# Altium PCB MB1814.PcbDoc (part 1 of 6)
Units mm, origin at the board's own origin, x right, y up, seen from the top; angles counter-clockwise.
Board outline 70 x 82.5 mm, 4 copper layers (Top Layer, Signal Layer 1, Signal Layer 2, Bottom Layer), stack 1.614 mm thick; 212 components, 160 nets, 914 pads, 715 vias.
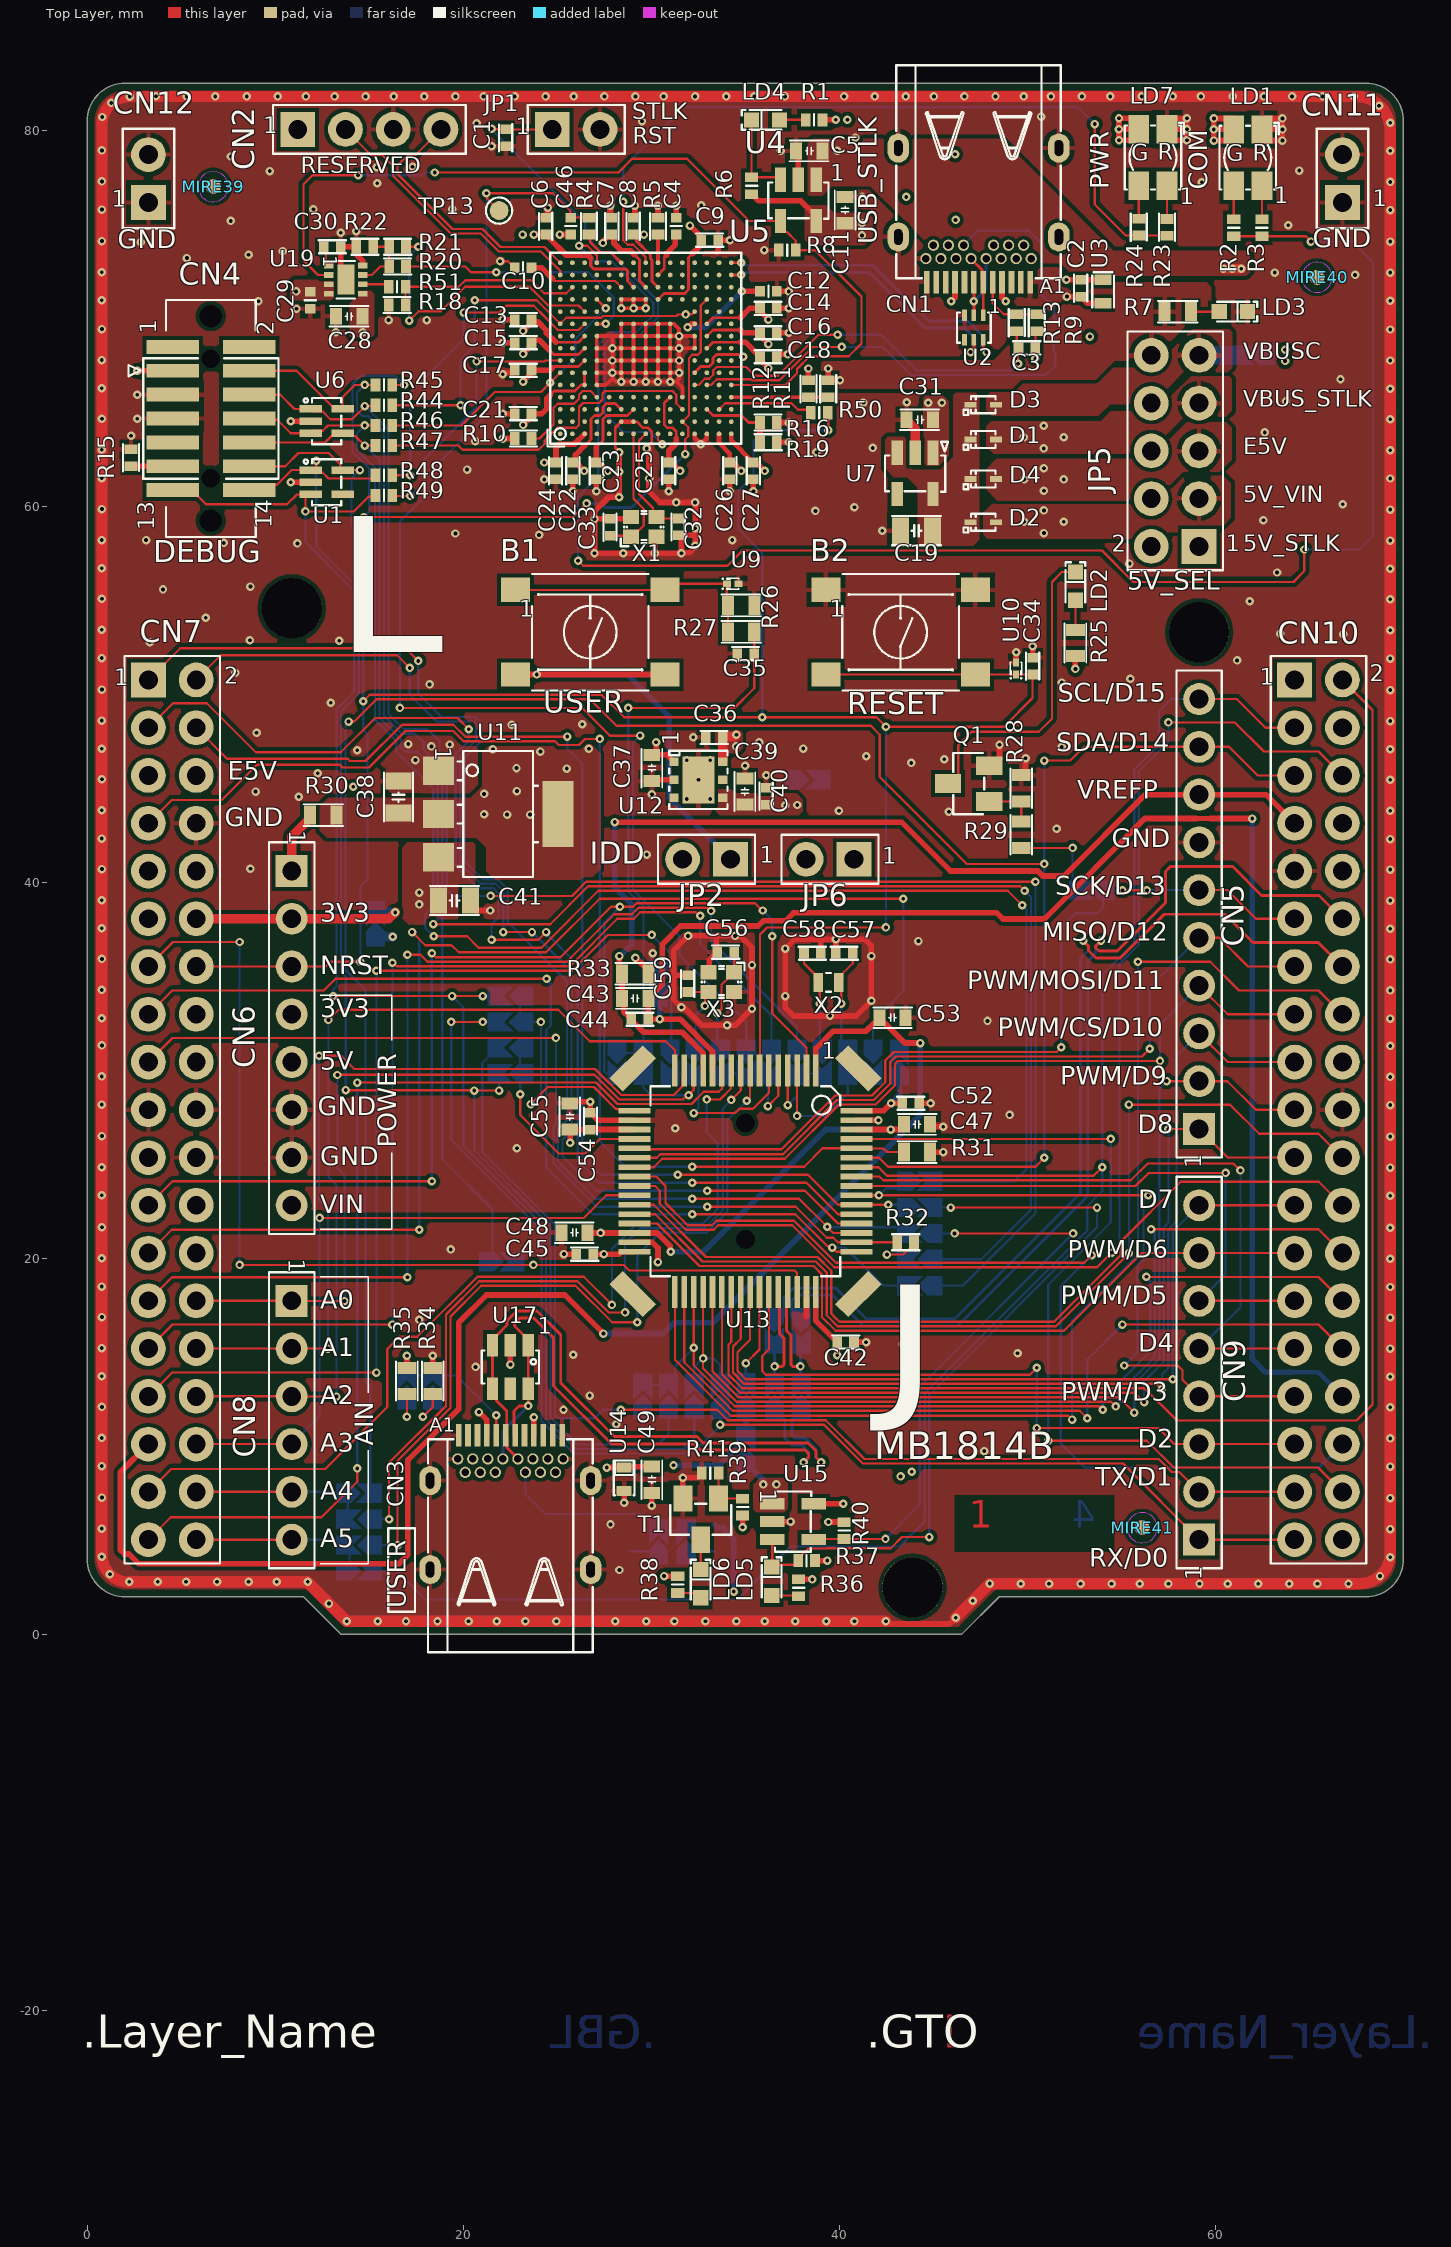
[diagram p0: Top Layer view]
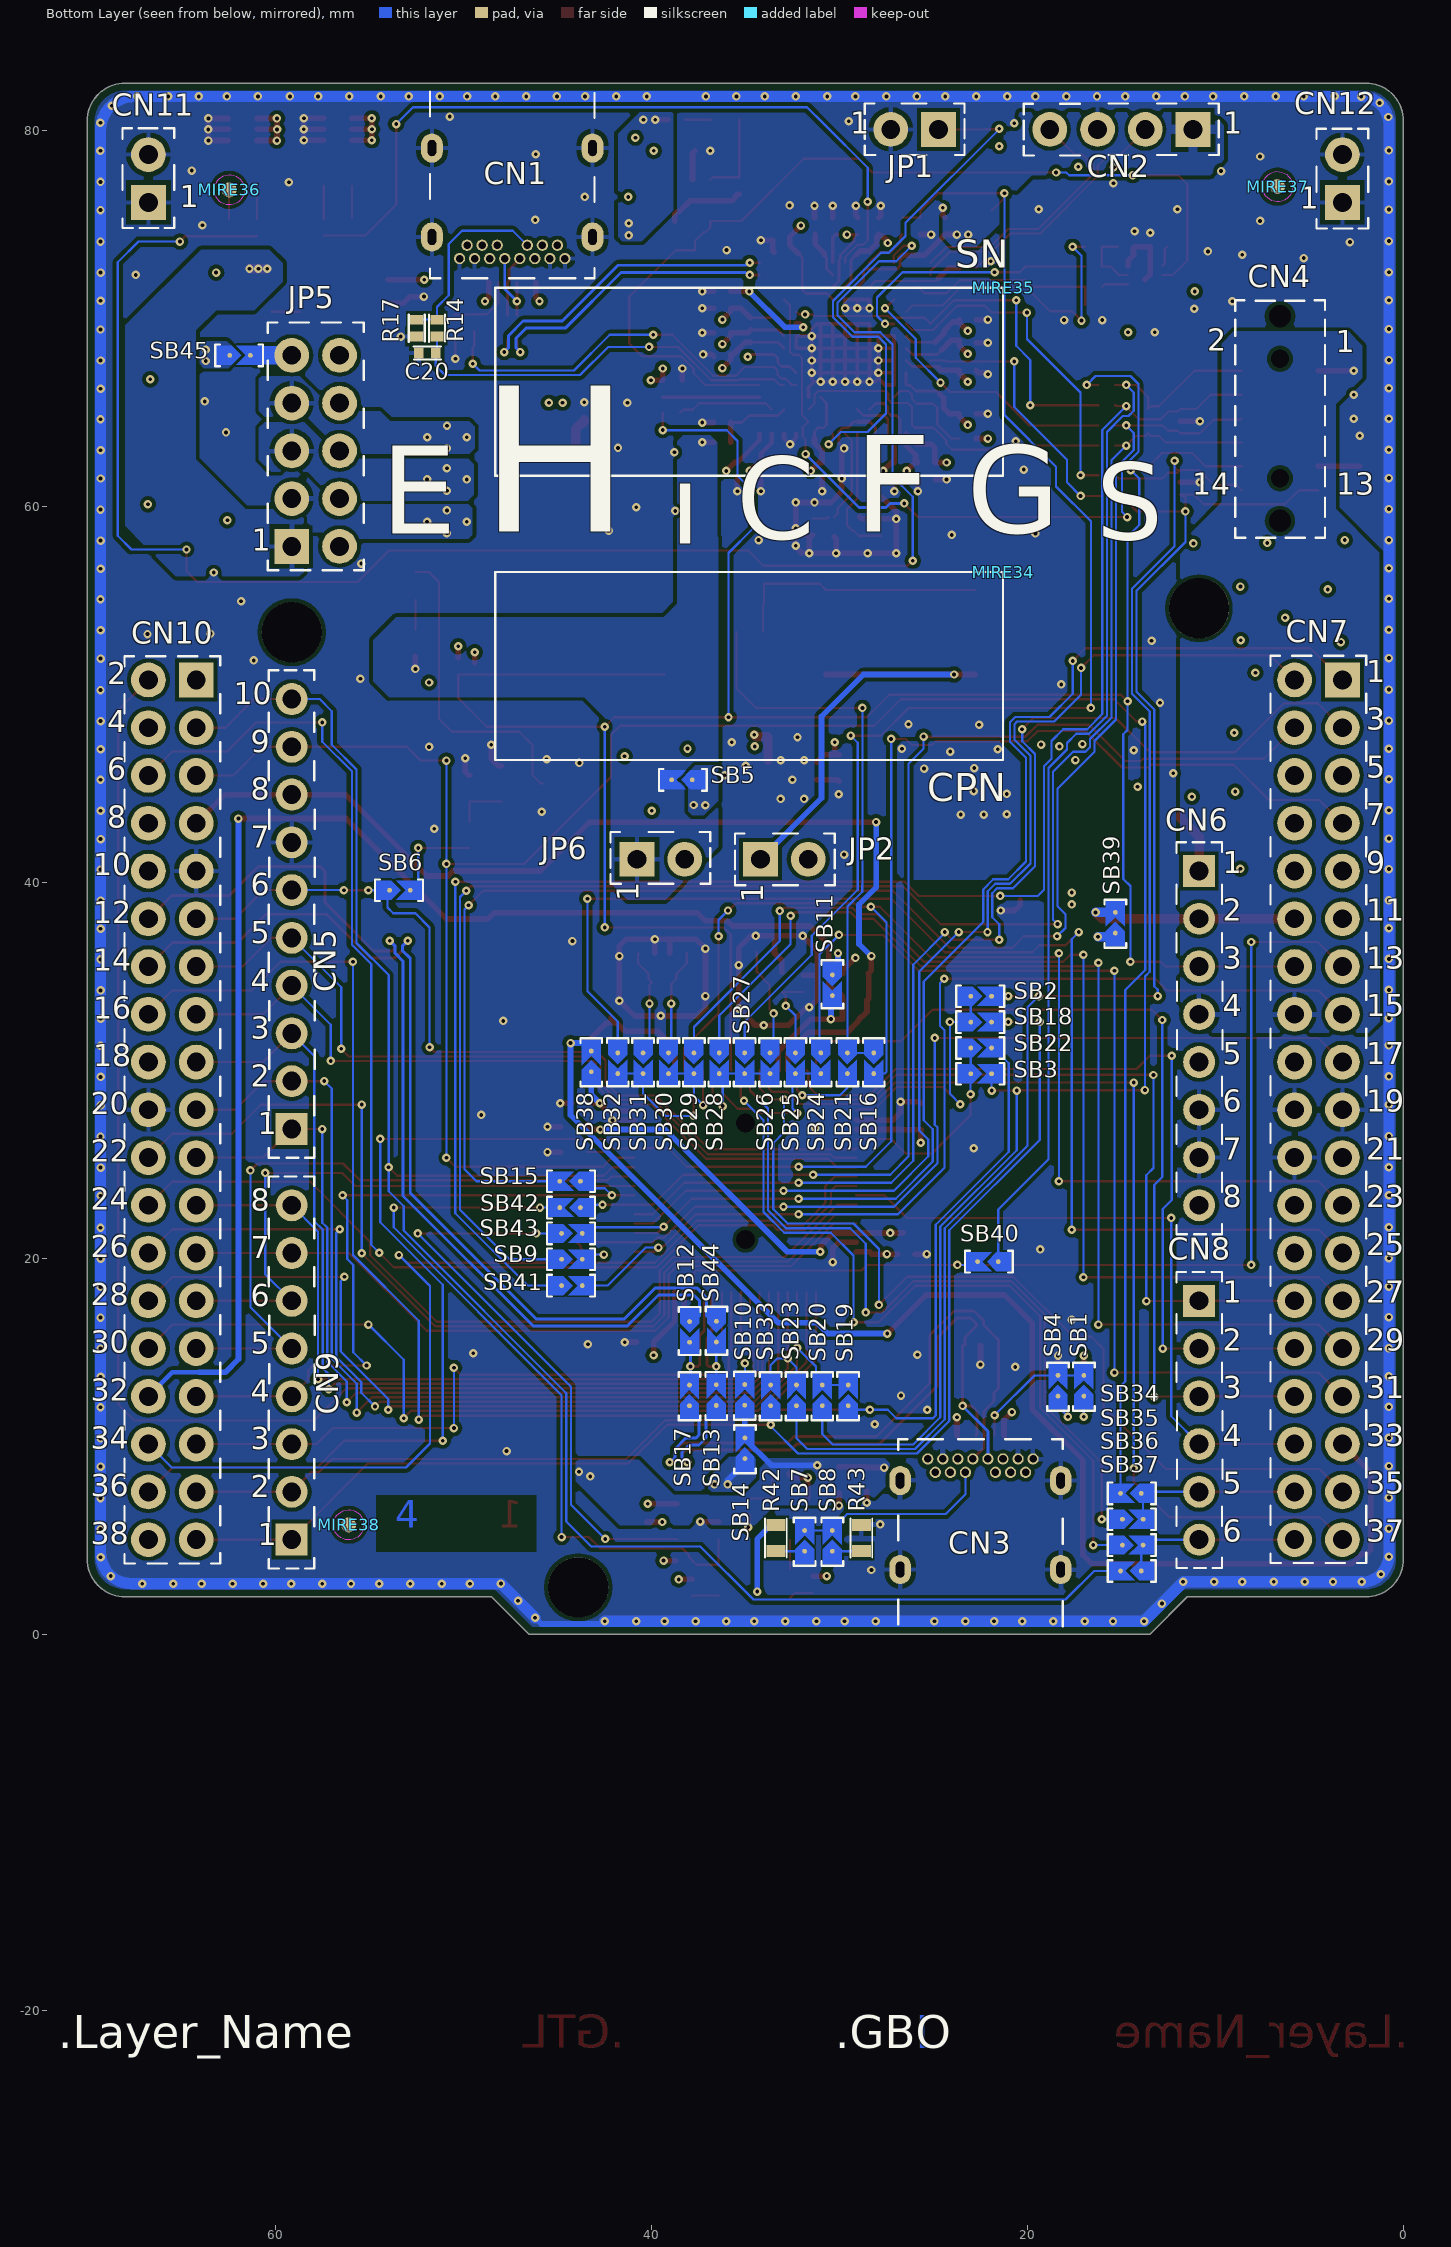
[diagram p1: Bottom Layer view, seen from below]
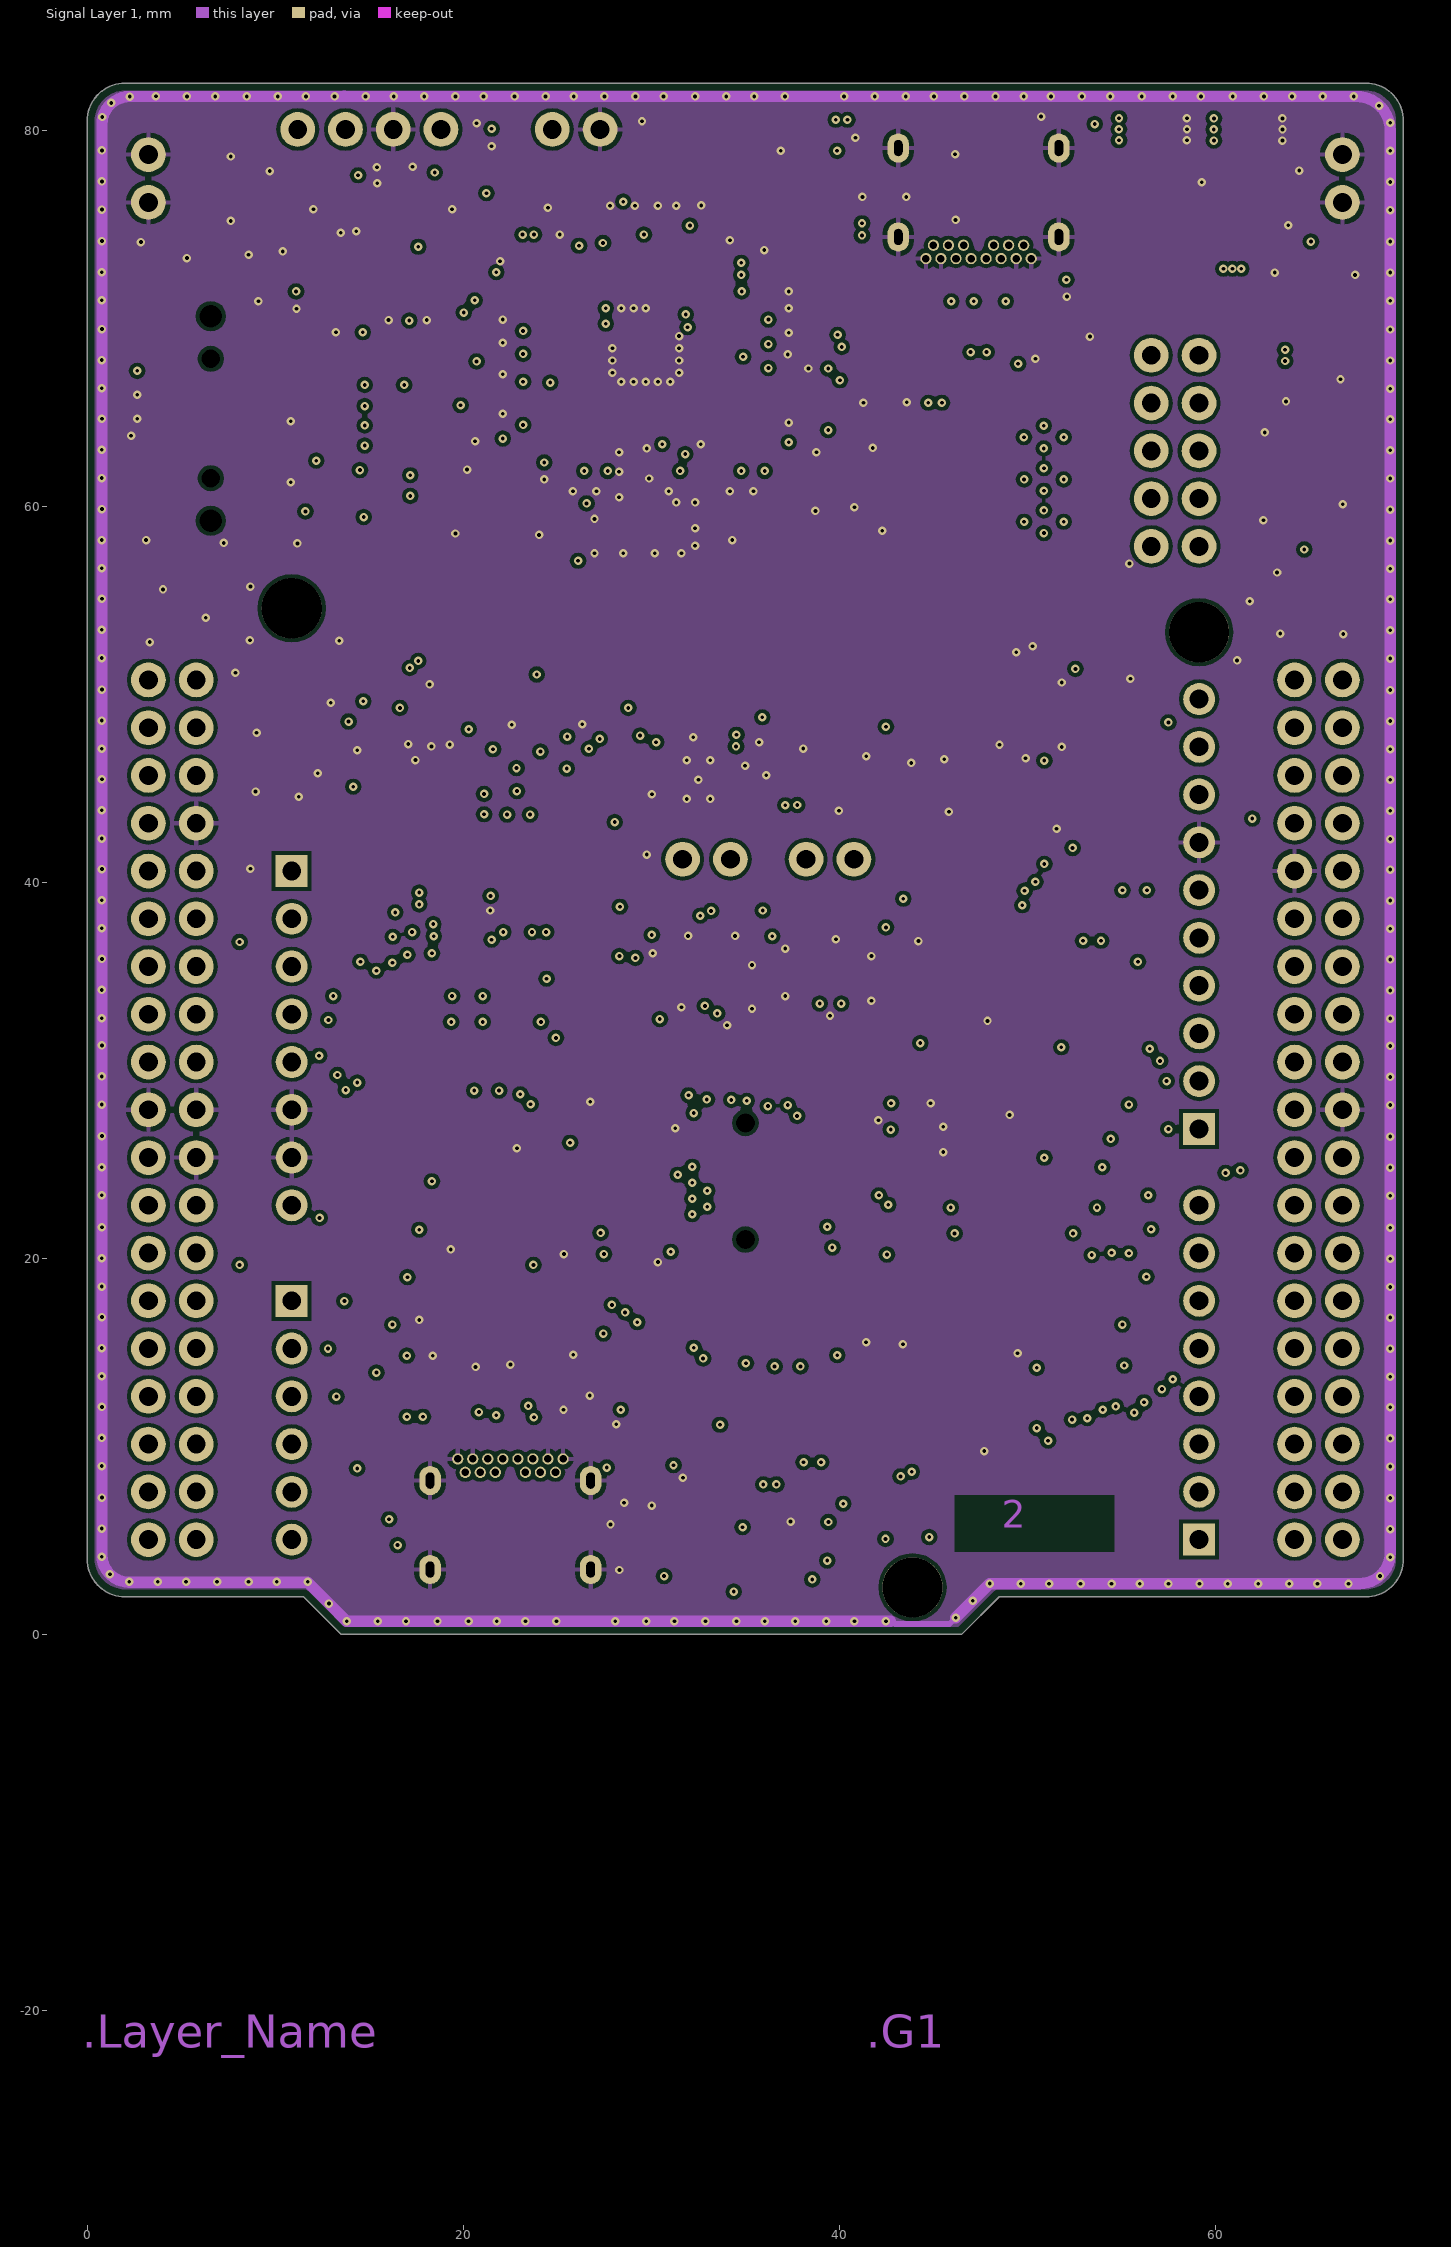
[diagram p2: Signal Layer 1]
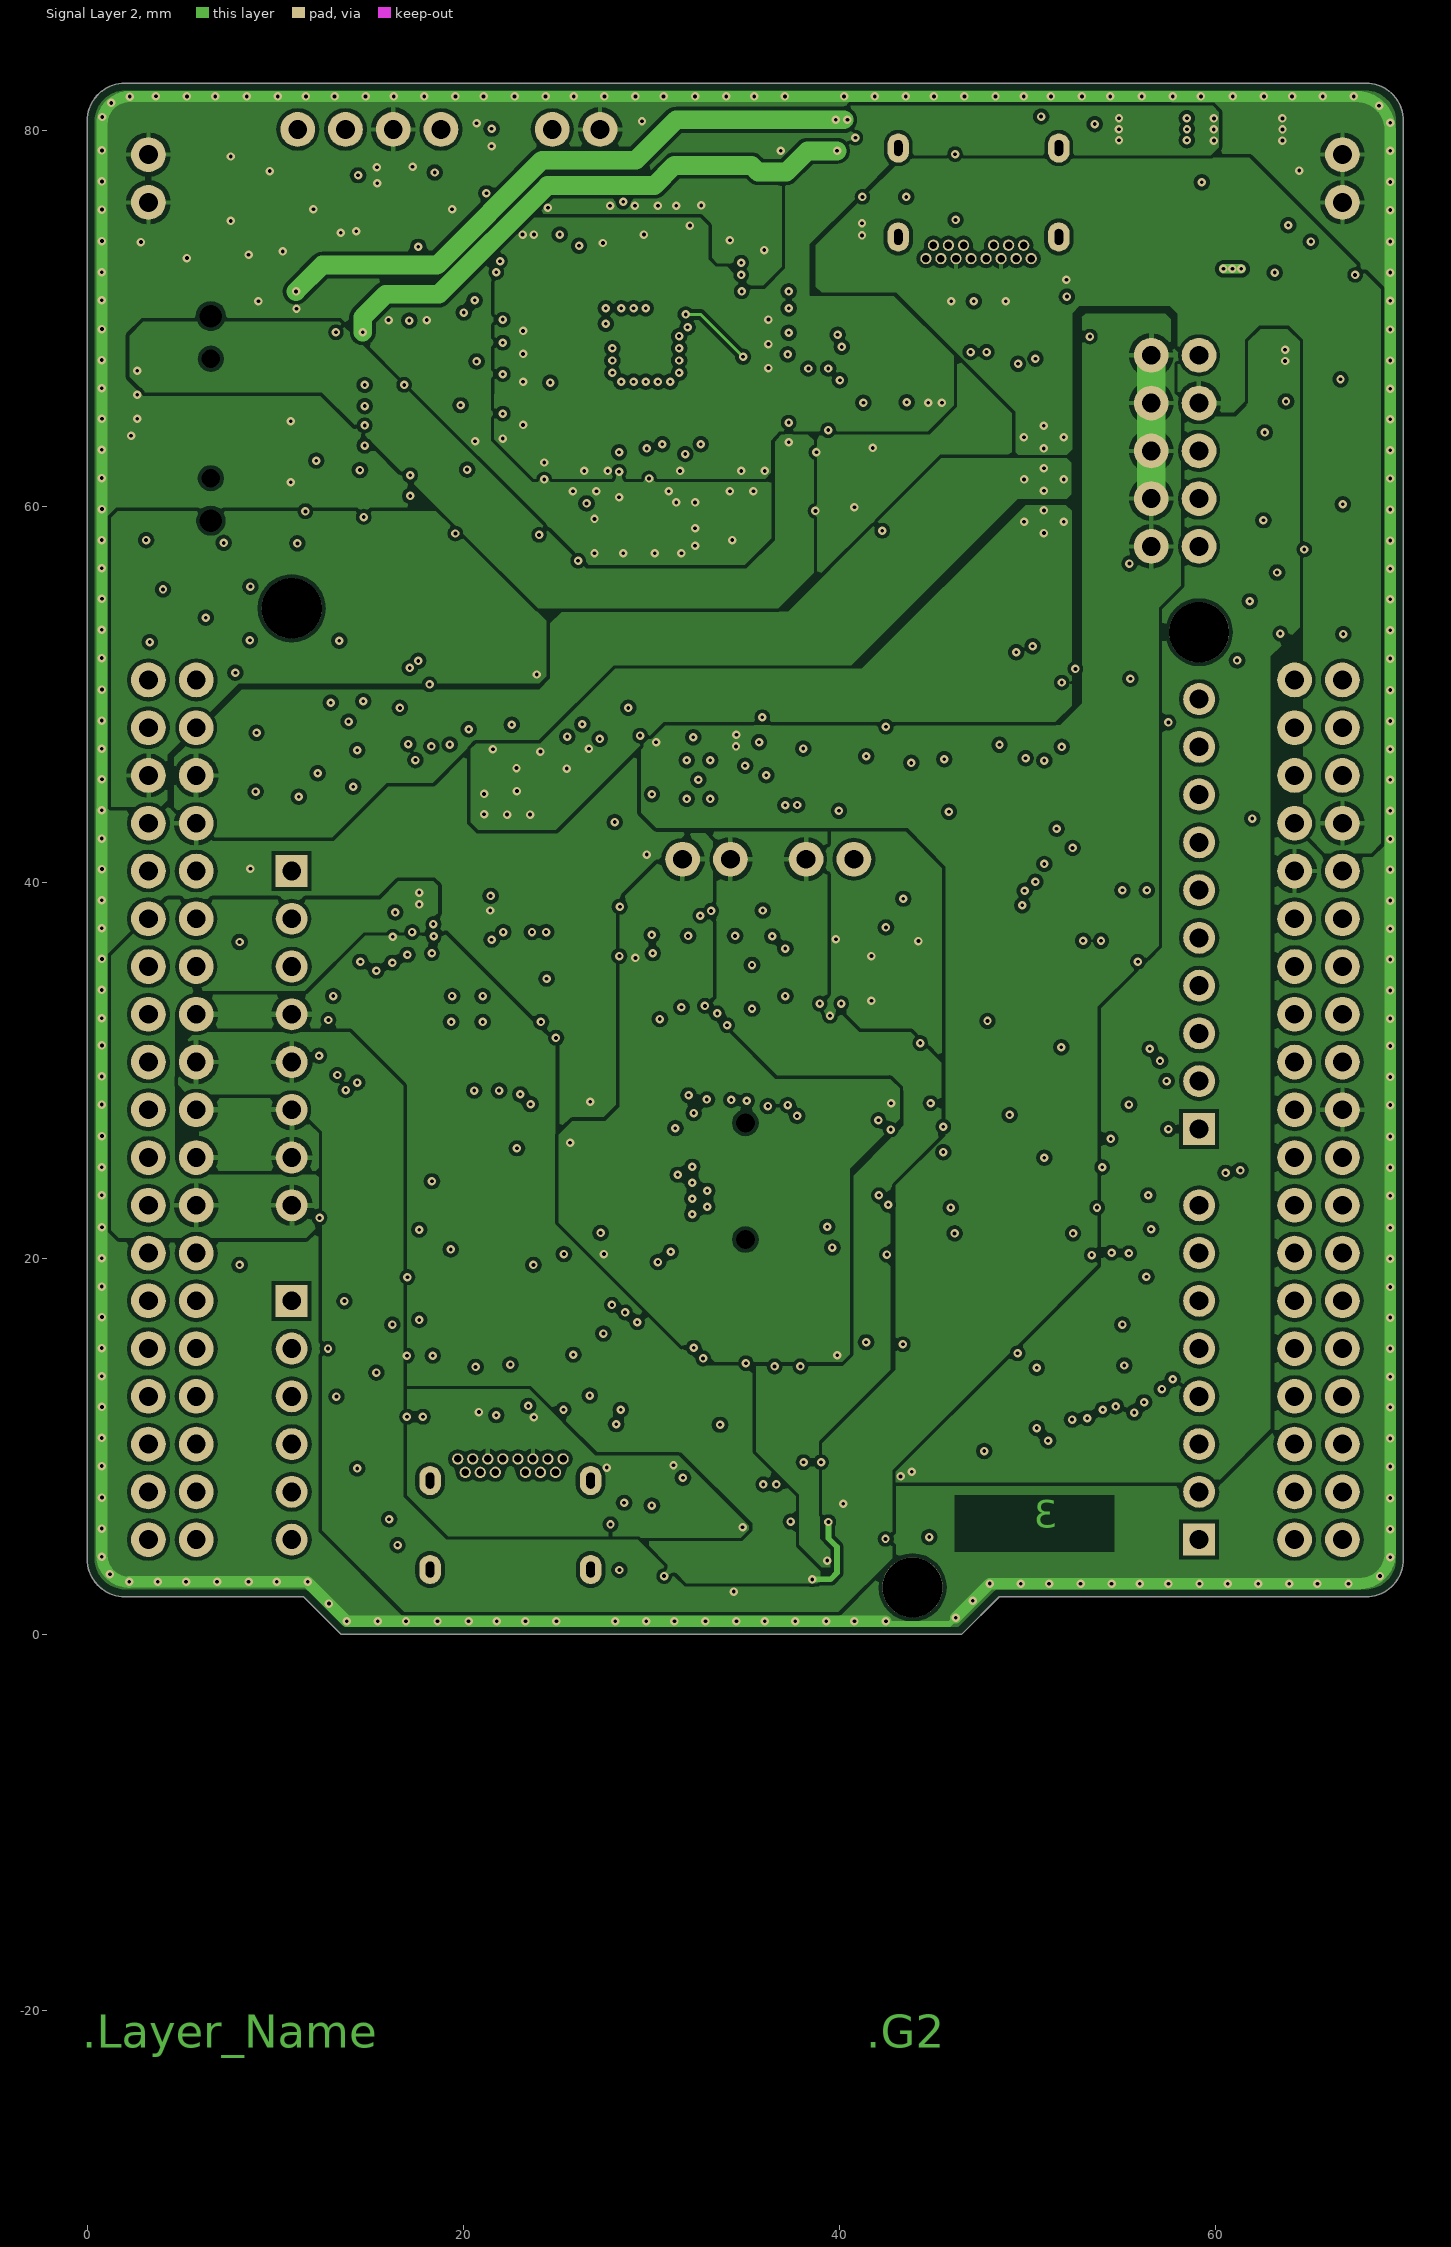
[diagram p3: Signal Layer 2]
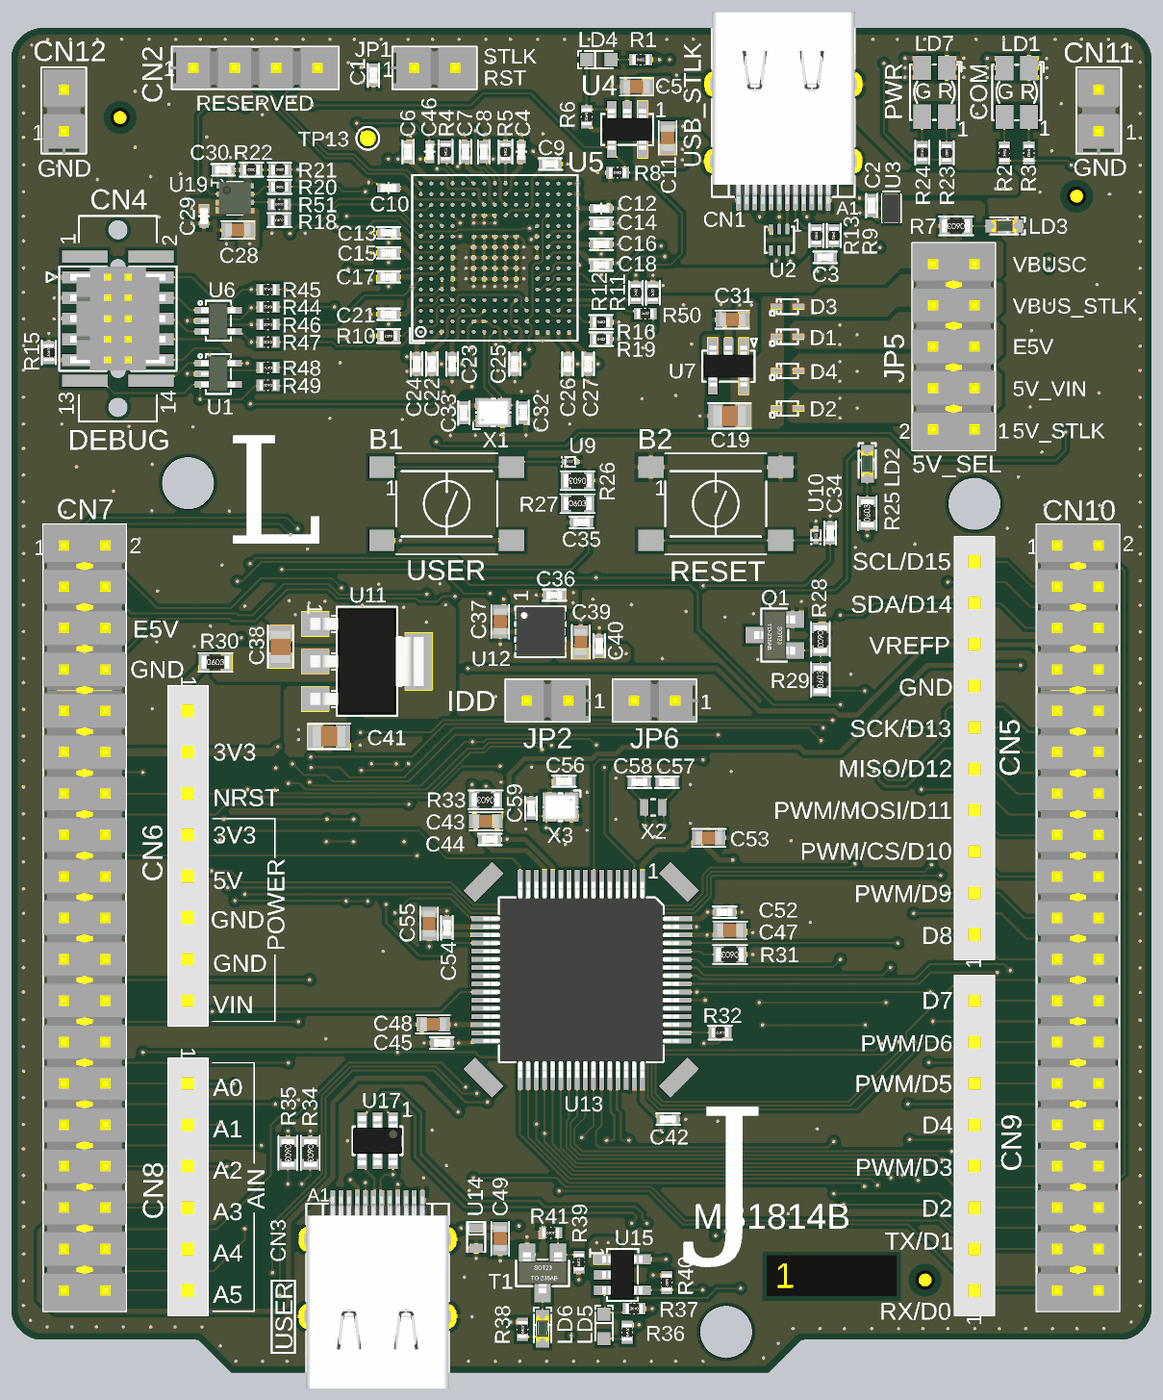
[diagram p7: 3D render of the assembled board from above, using the file's embedded part models]
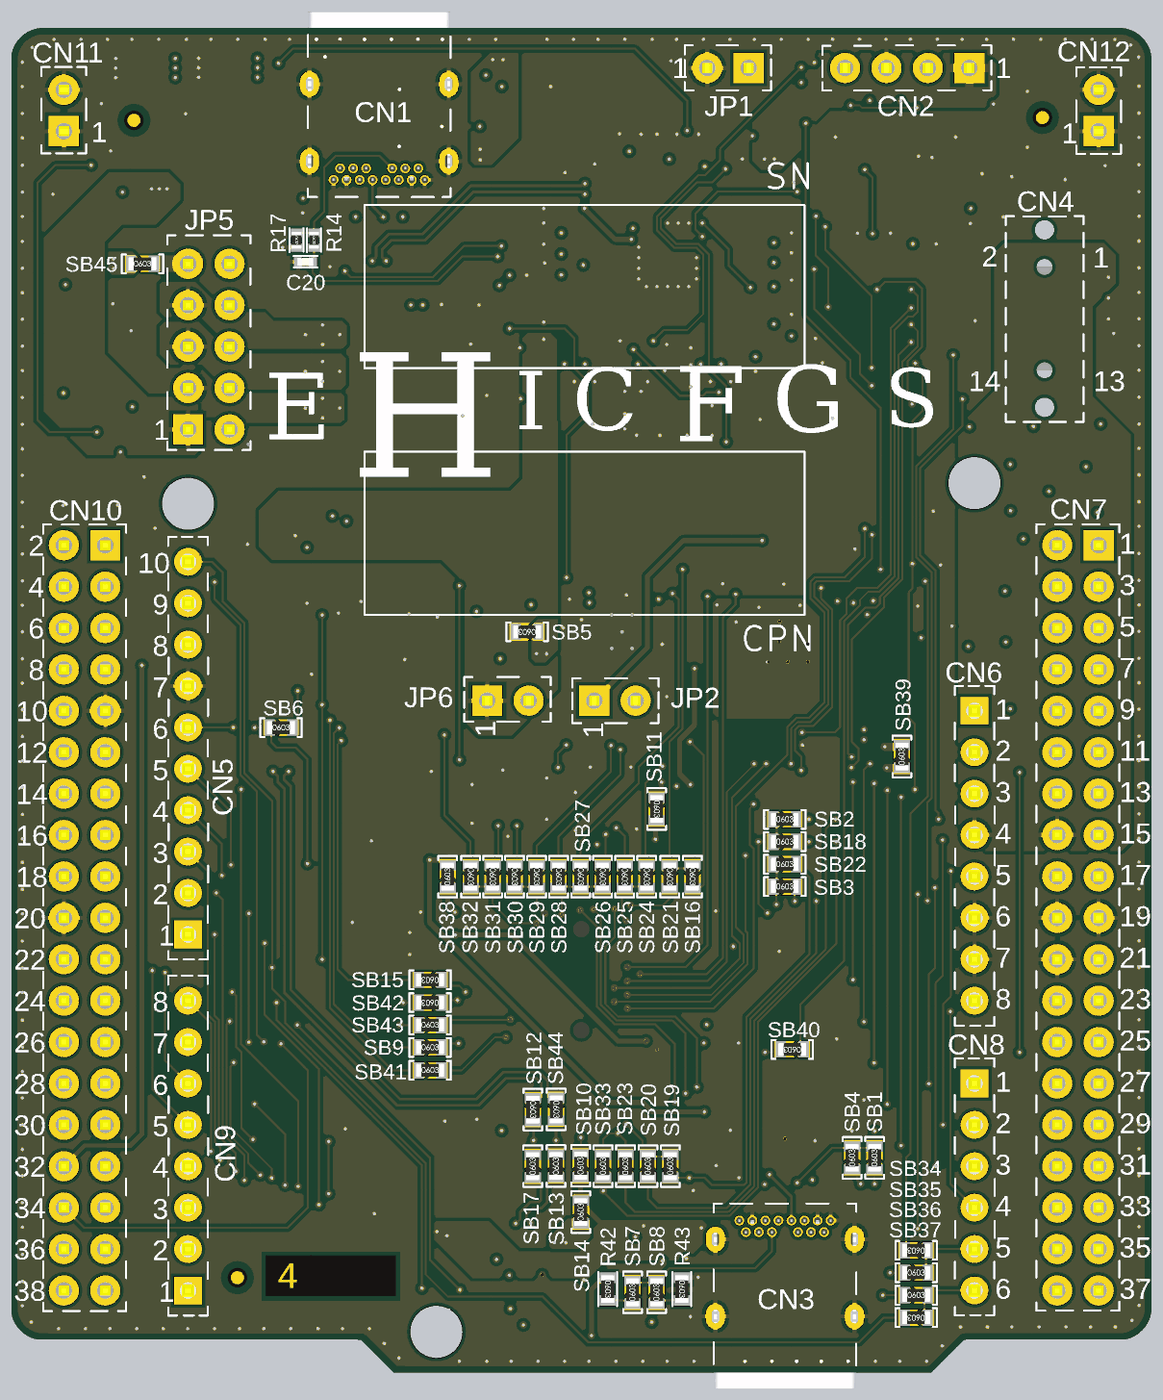
[diagram p8: 3D render of the assembled board from below, using the file's embedded part models]

## Layer stack, top to bottom
Top Solder: solder mask 0.015, Solder Resist, Dk 3.5
Top Layer: signal copper 0.042
Dielectric 1: prepreg 0.106, PP-IT-180A, Dk 4.2
Signal Layer 1: signal copper 0.035
Dielectric 2: core 1.248, FR4, Dk 4.2
Signal Layer 2: signal copper 0.035
Dielectric 3: prepreg 0.106, PP-IT-180A, Dk 4.2
Bottom Layer: signal copper 0.042
Bottom Solder: solder mask 0.015, Solder Resist, Dk 3.5

## Board outline
2,2 11.5,2 13.5,0 46.5,0 48.5,2 68,2 ccw(c68,4) 70,4 70,80.5 ccw(c68,80.5) 68,82.5 2,82.5 ccw(c2,80.5) 0,80.5 0,4 ccw(c2,4)

## Design rules (kind name [scope] priority, off if disabled: settings)
BoardOutlineClearance [All] p1: gap=0.4 ignorepadtopadclearanceinfootprint=FALSE
Clearance [All] p1: gap=0.12 ignorepadtopadclearanceinfootprint=FALSE except(0: Arc-Hole Track-Hole SMDPad-Hole THPad-Hole Via-Hole Fill-Hole Poly-Hole Region-Hole Text-Hole; 0.2: Arc-THPad Arc-Fill Arc-Poly Track-THPad Track-Fill Track-Poly SMDPad-SMDPad SMDPad-THPad SMDPad-Fill SMDPad-Poly THPad-THPad THPad-Fill THPad-Poly Via-Fill Via-Poly Fill-Fill Fill-Poly Poly-Poly)
ComponentClearance [All] p1 off: gap=0.025 collisioncheckmode=3 verticalgap=2540 showdistances=TRUE
DiffPairsRouting DiffPairsRouting_USB [InDifferentialPairClass('DIFF_USB')] p1: maxlimit=0.226 minlimit=0.127 mostfreqgap=0.226 toplayer_mingap=0.226 toplayer_minwidth=0.155 toplayer_maxwidth=0.155 toplayer_prefwidth=0.155 midlayer1_maxgap=0.127 midlayer1_prefgap=0.127 midlayer1_minwidth=0.083 midlayer1_maxwidth=0.083 midlayer1_prefwidth=0.083 midlayer2_maxgap=0.127 midlayer2_prefgap=0.127 midlayer2_minwidth=0.083 midlayer2_maxwidth=0.083 midlayer2_prefwidth=0.083 bottomlayer_mingap=0.226 bottomlayer_minwidth=0.155 bottomlayer_maxwidth=0.155 bottomlayer_prefwidth=0.155 impedanceprofiledriven=TRUE impedanceprofileid={C4311A3B-0D21-4955-8FB5-BB44CBD364A7} impedanceprofilevalue=90.000000 maxuncoupledlength=50
FanoutControl Fanout_BGA [IsBGA] p1: bgadir=Out bgaviamode=Closest fanoutstyle=Auto fanoutdirection=Alternating viagrid=0.025 // Fanout_BGA (Default Rule)
FanoutControl Fanout_LCC [IsLCC] p2: bgadir=Out bgaviamode=Closest fanoutstyle=Auto fanoutdirection=Alternating viagrid=0.025 // Fanout_LCC (Default Rule)
FanoutControl Fanout_SOIC [IsSOIC] p3: bgadir=Out bgaviamode=Closest fanoutstyle=Auto fanoutdirection=Alternating viagrid=0.025 // Fanout_SOIC (Default Rule)
FanoutControl Fanout_Small [(CompPinCount < 5)] p4: bgadir=Out bgaviamode=Closest fanoutstyle=Auto fanoutdirection=OutThenIn viagrid=0.025 // Fanout_Small (Default Rule)
FanoutControl Fanout_Default [All] p5: bgadir=Out bgaviamode=Closest fanoutstyle=Auto fanoutdirection=Alternating viagrid=0.025 // Fanout_Default (Default Rule)
Height [All] p1 off: minheight=0 maxheight=100 prefheight=0.5
HoleSize [All] p1: absolutevalues=TRUE maxlimit=10 minlimit=0.15 maxpercent=80.000 minpercent=20.000
HoleToHoleClearance [All] p1: gap=0.25 allowstackedmicrovias=TRUE
Length Length_USB [InNetClass('USB')] p1: maxlimit=50 minlimit=1
MatchedLengths [InDifferentialPairClass('DIFF_USB')] p1: tolerance=0.2 checknetsindiffpair=TRUE checkdiffpairvsdiffpair=FALSE checkxsignals=FALSE checkothers=FALSE
MaxMinImpedance "Schematic Impedance Constraint_3" [InNet('STLK_USB_P')] p1: minimum=85,00 maximum=95,00
MaxMinImpedance "Schematic Impedance Constraint_2" [InNet('STLK_USB_N')] p2: minimum=85,00 maximum=95,00
MaxMinImpedance "Schematic Impedance Constraint_1" [InNet('STLK_USB_CN_P')] p3: minimum=85,00 maximum=95,00
MaxMinImpedance "Schematic Impedance Constraint" [InNet('STLK_USB_CN_N')] p4: minimum=85,00 maximum=95,00
MinimumSolderMaskSliver [All] p1: minsoldermaskwidth=0
PlaneClearance [All] p1: clearance=0.6
PolygonConnect PolygonConnect_NO_FT [IsNamedPolygon('NO_FT')] p1: thpad.connectstyle=Relief thpad.reliefconductorwidth=0.25 thpad.reliefentries=4 thpad.polygonreliefangle="90 Angle" thpad.airgapwidth=0.25 smdpad.connectstyle=Direct smdpad.reliefconductorwidth=0.254 smdpad.reliefentries=4 smdpad.polygonreliefangle="45 Angle" smdpad.airgapwidth=0.254 via.connectstyle=Direct via.reliefconductorwidth=0.254 via.reliefentries=4 via.polygonreliefangle="45 Angle" via.airgapwidth=0.254
PolygonConnect PolygonConnect__DEFAULT [All] p2: thpad.connectstyle=Relief thpad.reliefconductorwidth=0.25 thpad.reliefentries=4 thpad.polygonreliefangle="90 Angle" thpad.airgapwidth=0.25 smdpad.connectstyle=Relief smdpad.reliefconductorwidth=0.254 smdpad.reliefentries=4 smdpad.polygonreliefangle="90 Angle" smdpad.airgapwidth=0.254 via.connectstyle=Direct via.reliefconductorwidth=0.254 via.reliefentries=4 via.polygonreliefangle="45 Angle" via.airgapwidth=0.254
RoutingVias [All] p1: holewidth=0.2 width=0.45 viastyle="Through Hole" minholewidth=0.2 minwidth=0.45 maxholewidth=0.2 maxwidth=0.45
SilkToSilkClearance [All] p1: silktosilkclearance=0
SilkToSolderMaskClearance [IsPad] p1: minsilkscreentomaskgap=0 clearancetoexposedcopper=TRUE
SolderMaskExpansion [All] p1: expansion=0.05 istentingtop=FALSE
Width Width_ALIM [InNetClass('ALIM')] p1: maxlimit=10 minlimit=0.12 preferedwidth=0.3
Width [All] p2: maxlimit=10 minlimit=0.12 preferedwidth=0.12
16 further rules are at their usual default settings.

## Classes and differential pairs
differential pair class DIFF_USB: NetCN10_x PAx STLK_USB STLK_USB_CN USB_FS
component class U_Arduino_extension_connectors: CN5 CN6 CN7 CN8 CN9 CN10 LD2 Q1 R25 R28 R29 R30 SB6 SB12 SB34 SB35 SB36 SB37 SB39 SB44
component class U_Power: C36 C37 C38 C39 C40 C41 CN11 CN12 HW5 HW6 JP5 JP6 LD3 R7 SB5 U11 U12
component class U_ST_LINK_V3EC: C1 C2 C3 C4 C5 C6 C7 C8 C9 C10 C11 C12 C13 C14 C15 C16 C17 C18 C19 C20 C21 C22 C23 C24 C25 C26 C27 C28 C29 C30 C31 C32 C33 C46 CN2 CN4 D1 D2 D3 D4 HW1 HW3 HW4 HW12 JP1 LD1 LD4 LD7 R1 R2 R3 R4 R5 R6 R8 R9 R10 R11 R12 R13 R14 R15 R16 R17 R18 R19 R20 R21 R22 R23 R24 R44 R45 R46 R47 R48 R49 R50 R51 TP13 U1 U2 U3 U4 U5 U6 U7 U19 X1
component class U_STM32_microcontroller_IOs: B1 B2 C34 C35 C56 C57 C58 C59 HW17 HW18 HW110 R26 R27 R31 R32 SB2 SB3 SB9 SB10 SB13 SB15 SB16 SB17 SB18 SB19 SB20 SB21 SB22 SB23 SB24 SB25 SB26 SB27 SB28 SB29 SB30 SB31 SB32 SB33 SB40 SB41 SB42 SB43 U9 U10 U13 X2 X3
component class U_STM32_microcontroller_power: C42 C43 C44 C45 C47 C48 C52 C53 C54 C55 HW2 JP2 R33 SB11 SB38
component class U_USB: C49 LD5 LD6 R34 R35 R36 R37 R38 R39 R40 R41 R42 R43 SB1 SB4 SB7 SB8 SB14 SB45 T1 U14 U15 U17
net class PA[0..15]: PA0 PA1 PA2 PA3 PA4 PA5 PA6 PA7 PA8 PA9 PA10 PA11 PA12 PA13 PA14 PA15
net class PB[0..15]: PB0 PB1 PB2 PB3 PB4 PB5 PB6 PB7 PB8 PB10 PB12 PB13 PB14 PB15
net class PC[0..15]: PC0 PC1 PC2 PC3 PC4 PC5 PC6 PC7 PC8 PC9 PC10 PC11 PC12 PC13 PC14 PC15
net class PF[0..1]: PF0 PF1
differential pair NetCN10_x: +NetCN10_12 -NetCN10_14
differential pair PAx: +PA12 -PA11
differential pair USB_FS: +USB_FS_P -USB_FS_N
differential pair STLK_USB_CN: +STLK_USB_CN_P -STLK_USB_CN_N
differential pair STLK_USB: +STLK_USB_P -STLK_USB_N

## Components (designator, comment, footprint, x,y, rotation, side; value= is the part's Value field where it differs from the comment)
B1 "SW_PUSH_SMD" SWI_APEM_ADTSM644KV_BLACK 26.745,53.3 r0 top value=SW-PUSH-ADTSM644KV
B2 "SW_PUSH_SMD" SWI_APEM_ADTSM644KV_BLACK 43.255,53.3 r0 top value=SW-PUSH-ADTSM644KV
C1 "Capacitor" C0402 22.25,79.6 r90 top value=100nF
C2 "Capacitor" C0402 52.825,71.6 r270 top value=100pF
C3 "Capacitor" C0402 49.975,68.425 r0 top value=10nF
C4 "Capacitor" C0402 31.325,74.9 r270 top value=2.2uF
C5 "Capacitor" C0603 38.402,78.895 r0 top value=10uF
C6 "Capacitor" C0402 24.375,74.9 r90 top value=100nF
C7 "Capacitor" C0402 27.9,74.9 r90 top value=100nF
C8 "Capacitor" C0402 29.025,74.9 r90 top value=100nF
C9 "Capacitor" C0402 33.1,74.15 r0 top value=100nF
C10 "Capacitor" C0402 23.175,72.675 r0 top value=2.2uF
C11 "Capacitor" C0603 40.3,75.75 r270 top value=1uF
C12 "Capacitor" C0402 36.225,71.425 r180 top value=2.2uF
C13 "Capacitor" C0402 23.175,69.925 r180 top value=100nF
C14 "Capacitor" C0402 36.225,70.525 r0 top value=100nF
C15 "Capacitor" C0402 23.175,68.7 r180 top value=100nF
C16 "Capacitor" C0402 36.225,69.225 r0 top value=100nF
C17 "Capacitor" C0402 23.175,67.225 r180 top value=100nF
C18 "Capacitor" C0402 36.225,67.95 r0 top value=100nF
C19 "Capacitor" C0805 44.1,58.7 r0 top value=2.2uF
C20 "Capacitor" C0402 51.925,68.15 r0 bottom value=10nF
C21 "Capacitor" C0402 23.175,64.925 r180 top value=100nF
C22 "Capacitor" C0402 25.825,61.875 r270 top value=100nF
C23 "Capacitor" C0402 27.075,61.875 r270 top value=100nF
C24 "Capacitor" C0402 24.9,61.875 r270 top value=100nF
C25 "Capacitor" C0402 30.925,61.875 r270 top value=100nF
C26 "Capacitor" C0402 34.175,61.875 r270 top value=100nF
C27 "Capacitor" C0402 35.425,61.875 r270 top value=100nF
C28 "Capacitor" C0603 13.925,70.1 r0 top value=10uF
C29 "Capacitor" C0402 11.85,70.95 r90 top value=100nF
C30 "Capacitor" C0402 13.025,73.8 r180 top value=10nF
C31 "Capacitor" C0603 44.275,64.6 r0 top value=10uF
C32 "Capacitor" C0402 31.425,58.9 r90 top value=2.7pF
C33 "Capacitor" C0402 27.8,58.875 r270 top value=2.7pF
C34 "" C0402 50.275,51.5 r270 top value=100nF
C35 "" C0402 35.02,52.165 r0 top value=100nF
C36 "" C0402 33.35,47.7 r0 top value=100nF
C37 "" C0603 30.025,46.075 r90 top value=1uF
C38 "" C0805 16.55,44.53 r270 top value=10uF
C39 "" C0603 34.975,44.825 r270 top value=1uF
C40 "" C0402 36.1,44.575 r270 top value=100nF
C41 "" C0805 19.525,39.03 r180 top value=10uF
C42 "" C0402 40.325,15.55 r180 top value=100nF
C43 "" C0603 29.14,33.825 r180 top value=1uF
C44 "" C0402 29.385,32.715 r180 top value=100nF
C45 "" C0402 26.45,20.225 r0 top value=100nF
C46 "Capacitor" C0402 25.7,74.9 r90 top value=20pF
C47 "Capacitor" C0603 44.125,27.125 r180 top value=2.2uF
C48 "Capacitor" C0603 25.91,21.365 r0 top value=2.2uF
C49 "Capacitor" C0603 30.025,8.225 r90 top value=4.7uF
C52 "" C0402 43.8,28.25 r180 top value=100nF
C53 "" C0603 42.825,32.8 r180 top value=1uF
C54 "" C0402 26.76,27.29 r270 top value=100nF
C55 "" C0603 25.66,27.54 r270 top value=4.7uF
C56 "" C0402 33.95,36.29 r0 top value=6.8pF
C57 "Capacitor" C0402 40.265,36.225 r0 top value=3.3pF
C58 "Capacitor" C0402 38.565,36.225 r180 top value=3.3pF
C59 "" C0402 31.925,34.615 r270 top value=6.8pF
CN1 "USB_TYPE_C_Receptacle" "CON_USB-TYPEC_WE_632723300011 " 47.4,82.5 r180 top value=USB_C_632723300011
CN2 "Header 4x1" CON_SAMTEC_TSW-104-07-G-S 15,80.04 r0 top
CN3 "USB_TYPE_C_Receptacle" "CON_USB-TYPEC_WE_632723300011 " 22.5,0 r0 top value=USB_C_632723300011
CN4 "Header 7x2" CON_STDC14_Receiver_MEDIUM_WITH_MIPI10_3D 6.57,64.665 r270 top locked value="Header 5x2"
CN5 "Socket 10x1" CON_SAMTEC_SSQ-110-03-F-S 59.13,38.314 r90 top locked
CN6 "Socket 8x1" CON_SAMTEC_SSQ-108-03-F-S 10.87,31.71 r270 top locked
CN7 "" CON_SAMTEC_TSW-119-09-X-D 4.52,27.9 r270 top locked value="Header 19x2"
CN8 "Socket 6x1" CON_SAMTEC_SSQ-106-03-F-S 10.87,11.39 r270 top locked
CN9 "Socket 8x1" CON_SAMTEC_SSQ-108-03-F-S 59.13,13.93 r90 top
CN10 "" CON_SAMTEC_TSW-119-09-X-D 65.48,27.9 r270 top locked value="Header 19x2"
CN11 "Jumper_Header 2x1" CON_SAMTEC_TSW-102-09-X-S 66.75,77.43 r90 top value="Header 2x1"
CN12 "Jumper_Header 2x1" CON_SAMTEC_TSW-102-09-X-S 3.25,77.43 r90 top locked value="Header 2x1"
D1 "SCHOTTKY_1A_2K" DIO_SOD523_1A_2K 47.65,63.55 r180 top value=BAT54KFILM
D2 "SCHOTTKY_1A_2K" DIO_SOD523_1A_2K 47.65,59.15 r180 top value=BAT54KFILM
D3 "SCHOTTKY_1A_2K" DIO_SOD523_1A_2K 47.65,65.4 r180 top value=BAT54KFILM
D4 "SCHOTTKY_1A_2K" DIO_SOD523_1A_2K 47.65,61.45 r180 top value=BAT54KFILM
JP1 "Jumper_Header 2x1" CON_SAMTEC_TSW-102-07-G-S 26,80.04 r0 top
JP2 "Shunt Fitted" CON_SAMTEC_TSW-102-07-G-S 32.93,41.225 r180 top
JP5 "Jumper_Header 5x2 Fitted 1-2" CON_SAMTEC_TSW-105-07-X-D 57.855,62.945 r90 top value="Header 5x2"
JP6 "Shunt Fitted" CON_SAMTEC_TSW-102-07-G-S 39.5,41.225 r180 top
LD1 "LED_BICOLOR" LED_BI-GR_WE-150141SV73110 61.72,78.54 r180 top value="Green / Red"
LD2 "LED_green" LED_0603_OSRAM_LG-Q396-PS-35_GREEN_1A2K_H0P4 52.55,55.75 r90 top value=GREEN
LD3 "LED_green" LED_0603_OSRAM_LG-Q396-PS-35_GREEN_1A2K_H0P4 60.95,70.35 r0 top value=GREEN
LD4 "LED_red" LED_0603_VISHAY_VLMS1300-GS08_RED_1A2K_H0P8 36.075,80.55 r180 top value=RED
LD5 "LED_red" LED_0603_VISHAY_VLMS1300-GS08_RED_1A2K_H0P8 36.4,2.825 r90 top value=RED
LD6 "LED_green" LED_0603_OSRAM_LG-Q396-PS-35_GREEN_1A2K_H0P4 32.625,2.7 r90 top value=GREEN
LD7 "LED_BICOLOR" LED_BI-GR_WE-150141SV73110 56.675,78.55 r180 top value="Green / Red"
MIRE34 "Comment" LOGO_ETIQUETTE 21.3,56.5 r0 bottom
MIRE35 "Comment" LOGO_ETIQUETTE 21.3,71.625 r0 bottom
MIRE36 "Comment" MIRE_PLACE_SMD_0P8MM 62.45,76.825 r0 bottom
MIRE37 "Comment" MIRE_PLACE_SMD_0P8MM 6.7,77 r0 bottom
MIRE38 "Comment" MIRE_PLACE_SMD_0P8MM 56.1,5.825 r0 bottom
MIRE39 "Comment" MIRE_PLACE_SMD_0P8MM 6.7,77 r180 top
MIRE40 "Comment" MIRE_PLACE_SMD_0P8MM 65.4,72.175 r0 top
MIRE41 "Comment" MIRE_PLACE_SMD_0P8MM 56.1,5.675 r0 top
Q1 "" NPN_SOT23 46.875,45.25 r90 top value="NPN SOT23"
R1 "Resistor" R0402 38.65,80.55 r0 top value=1K
R2 "Resistor" R0402 60.97,74.815 r90 top value=330R
R3 "Resistor" R0402 62.47,74.815 r270 top value=1K
R4 "Resistor" R0402 26.675,74.9 r90 top value=100R
R5 "Resistor" R0402 30.35,74.9 r90 top value=3K
R6 "Resistor" R0402 35.327,77.045 r270 top value=100K
R7 "" R0603 58,70.35 r180 top value=510R
R8 "Resistor" R0402 37.227,73.62 r0 top value=10K
R9 "Resistor" R0402 50.5,69.75 r270 top value=5K1
R10 "Resistor" R0402 23.175,63.6 r180 top value=10K
R11 "Resistor" R0402 39.4,66.25 r90 top value=5K1
R12 "Resistor" R0402 38.35,66.25 r90 top value=10K
R13 "Resistor" R0402 49.425,69.75 r270 top value=100K
R14 "Resistor" R0402 51.4,69.475 r270 bottom value=100K
R15 "Resistor" R0402 2.325,62.575 r270 top value=100R
R16 "Resistor" R0402 36.225,64.45 r0 top value=10K
R17 "Resistor" R0402 52.475,69.475 r270 bottom value=5K1
R18 "Resistor" R0402 16.475,70.7 r0 top value=5K1
R19 "Resistor" R0402 36.225,63.4 r0 top value=10K
R20 "Resistor" R0402 16.5,72.75 r0 top value=1K8
R21 "Resistor" R0402 16.5,73.8 r0 top value=1K2
R22 "Resistor" R0402 14.75,73.8 r180 top value=3K
R23 "Resistor" R0402 57.425,74.825 r270 top value=1K
R24 "Resistor" R0402 55.925,74.85 r270 top value=330R
R25 "" R0603 52.55,52.725 r90 top value=510R
R26 "" R0603 34.775,54.725 r180 top value=100K
R27 "" R0603 34.77,53.315 r0 top value=330R
R28 "" R0603 49.675,45 r270 top value=100K
R29 "" R0603 49.675,42.525 r90 top value=47K
R30 "" R0603 12.55,43.575 r0 top value=1K
R31 "" R0603 44.125,25.65 r180 top value=10K
R32 "" R0402 43.515,20.86 r180 top value=47R
R33 "Resistor" R0603 29.135,35.14 r180 top value=0R
R34 "Resistor" R0603 17,13.475 r270 top value="56K - 1%"
R35 "Resistor" R0603 18.375,13.475 r270 top value="5K1 - 1%"
R36 "Resistor" R0402 37.825,2.475 r90 top value=360R
R37 "Resistor" R0402 38.25,3.925 r180 top value=47K
R38 "Resistor" R0402 31.4,2.65 r90 top value=270R
R39 "Resistor" R0402 34.85,6.775 r90 top value=47K
R40 "Resistor" R0402 40.25,5.525 r270 top value=47K
R41 "Resistor" R0402 33.125,8.575 r0 top value=10K
R42 "Resistor" R0603 33.376,5.125 r270 bottom value="56K - 1%"
R43 "Resistor" R0603 28.826,5.125 r270 bottom value="5K1 - 1%"
R44 "Resistor" R0402 15.775,65.375 r180 top value=33R
R45 "Resistor" R0402 15.775,66.45 r180 top value=33R
R46 "Resistor" R0402 15.775,64.3 r180 top value=0R
R47 "Resistor" R0402 15.775,63.225 r180 top value=33R
R48 "Resistor" R0402 15.775,61.65 r180 top value=0R
R49 "Resistor" R0402 15.775,60.575 r180 top value=33R
R50 "Resistor" R0402 38.925,64.975 r0 top value=0R
R51 "Resistor" R0402 16.475,71.675 r0 top value=3K
SB1 "" SOLDER-BRIDGE_R0603-0R 17,13.175 r90 bottom
SB2 "" SOLDER-BRIDGE_R0603-0R 22.51,33.94 r180 bottom
SB3 "" SOLDER-BRIDGE_R0603-0R 22.51,29.815 r180 bottom
SB4 "" SOLDER-BRIDGE_R0603-0R 18.375,13.175 r90 bottom
SB5 "" SOLDER-BRIDGE_R0603-0R 38.325,45.45 r0 bottom
SB6 "" SOLDER-BRIDGE_R0603-0R 53.425,39.575 r180 bottom
SB7 "" SOLDER-BRIDGE_R0603-0R 31.851,4.925 r90 bottom
SB8 "" SOLDER-BRIDGE_R0603-0R 30.376,4.925 r90 bottom
SB9 "" SOLDER-BRIDGE_R0603-0R 44.275,19.95 r180 bottom
SB10 "" SOLDER-BRIDGE_R0603-0R 35.035,12.69 r90 bottom
SB11 "" SOLDER-BRIDGE_R0603-0R 30.375,34.575 r270 bottom
SB12 "" SOLDER-BRIDGE_R0603-0R 37.967,16.136 r270 bottom
SB13 "" SOLDER-BRIDGE_R0603-0R 36.55,12.675 r90 bottom
SB14 "" SOLDER-BRIDGE_R0603-0R 35.025,9.85 r90 bottom
SB15 "" SOLDER-BRIDGE_R0603-0R 44.275,24.1 r0 bottom
SB16 "" SOLDER-BRIDGE_R0603-0R 28.175,30.425 r270 bottom
SB17 "" SOLDER-BRIDGE_R0603-0R 37.976,12.661 r90 bottom
SB18 "" SOLDER-BRIDGE_R0603-0R 22.51,32.565 r180 bottom
SB19 "" SOLDER-BRIDGE_R0603-0R 29.535,12.665 r90 bottom
SB20 "" SOLDER-BRIDGE_R0603-0R 30.91,12.665 r90 bottom
SB21 "" SOLDER-BRIDGE_R0603-0R 29.575,30.425 r270 bottom
SB22 "" SOLDER-BRIDGE_R0603-0R 22.51,31.19 r180 bottom
SB23 "" SOLDER-BRIDGE_R0603-0R 32.285,12.665 r90 bottom
SB24 "" SOLDER-BRIDGE_R0603-0R 30.99,30.425 r270 bottom
SB25 "" SOLDER-BRIDGE_R0603-0R 32.34,30.425 r270 bottom
SB26 "" SOLDER-BRIDGE_R0603-0R 33.69,30.425 r270 bottom
SB27 "" SOLDER-BRIDGE_R0603-0R 35.04,30.425 r270 bottom
SB28 "" SOLDER-BRIDGE_R0603-0R 36.39,30.425 r270 bottom
SB29 "" SOLDER-BRIDGE_R0603-0R 37.74,30.425 r270 bottom
SB30 "" SOLDER-BRIDGE_R0603-0R 39.09,30.425 r270 bottom
SB31 "" SOLDER-BRIDGE_R0603-0R 40.44,30.425 r270 bottom
SB32 "" SOLDER-BRIDGE_R0603-0R 41.79,30.425 r270 bottom
SB33 "" SOLDER-BRIDGE_R0603-0R 33.66,12.665 r90 bottom
SB34 "" SOLDER-BRIDGE_R0603-0R 14.45,7.5 r0 bottom
SB35 "" SOLDER-BRIDGE_R0603-0R 14.45,6.125 r180 bottom
SB36 "" SOLDER-BRIDGE_R0603-0R 14.45,4.75 r180 bottom
SB37 "" SOLDER-BRIDGE_R0603-0R 14.45,3.375 r0 bottom
SB38 "" SOLDER-BRIDGE_R0603-0R 43.2,30.425 r90 bottom
SB39 "" SOLDER-BRIDGE_R0603-0R 15.325,37.8 r90 bottom
SB40 "" SOLDER-BRIDGE_R0603-0R 22.05,19.825 r0 bottom
SB41 "" SOLDER-BRIDGE_R0603-0R 44.275,18.55 r180 bottom
SB42 "" SOLDER-BRIDGE_R0603-0R 44.275,22.7 r0 bottom
SB43 "" SOLDER-BRIDGE_R0603-0R 44.275,21.325 r180 bottom
SB44 "" SOLDER-BRIDGE_R0603-0R 36.541,16.15 r270 bottom
SB45 "" SOLDER-BRIDGE_R0603-0R 61.925,68.025 r180 bottom
T1 "9013-SOT23" NPN_SOT23 32.625,6.125 r180 top value=SOT23
TP13 "Test Point" TP_SMD_1MM 21.9,75.725 r90 top
U1 "ESDALC6V1W5" ESD_SOT323-5L 12.725,61.275 r270 top
U2 "ECMF02-2AMX6" ESD_QFN-6L_1P7X1P5_P050 47.15,69.5 r180 top
U3 "ESD-TRANSIL" ESD_QFN1610_2N_1K_2A 54.025,71.425 r270 top value=ESDA25P35-1U1M
U4 "STMPS2151STR" MOS_SOT23-5L 37.817,76.27 r180 top
U5 "STLINK-V3EC" ICC_UFBGA201_176+25_10X10_P065 29.7,68.4 r90 top locked value=STM32F723IEK6
U6 "ESDALC6V1W5" ESD_SOT323-5L 12.725,64.525 r270 top
U7 "ST730M33R" ICC_SOT23-5L_H1P45 44.03,61.75 r180 top
U9 "" ESD_ST0201 34.325,55.875 r0 top value=ESDALC6V1-1U2
U10 "" ESD_ST0201 49.395,51.365 r90 top value=ESDALC6V1-1U2
U11 "" REG_SOT223-TAB 21.85,43.63 r270 top value=LD1117S50TR
U12 "" ICC_DFN6-EPAD_3X3_P095 32.5,45.45 r270 top value=LD39050PU33R
U13 "STM32H503RBH6" ICC_LQFP64_10X10_P050_SOCKET_YAMAICHI_IC149-064-069-B5_NM 35,24.1 r180 top
U14 "ESD-TRANSIL" ESD_QFN2_1P6X1_P125 28.55,8.25 r270 top value=ESDA7P60-1U1M
U15 "STMPS2141STR" MOS_SOT23-5L 37.525,6 r270 top
U17 "USBLC6-2SC6" ESD_SOT23-6L 22.5,14.225 r180 top
U19 "TPS259535DSG" ICC_WSON8-EPAD_2X2_P050 13.75,72.05 r0 top
X1 "XTAL_4_PINS" CRY_NX2016SA_4P 29.6,58.9 r0 top value=24MHz
X2 "XTAL_2_PINS" CRY_NX1610SE_2P 39.415,34.675 r0 top value=32.768kHz
X3 "" CRY_NX2016SA_4P 33.725,34.69 r180 top value="NX2016SA 24MHz"

## Footprints (in the part's own frame and the unit in brackets; to place one, negate y for a bottom-side part, rotate by r counter-clockwise, add the part's x,y. Pads: shape width x height; smd on the part's side, far side on the other; paste and mask are expansions set on the pad)
C0402 [mm]
  rect 0.51x0.56 smd mask+0.05: 1(-0.45,0) 2(0.45,0)
  silkscreen extent -0.72,-0.35 0.72,0.35, body extent -0.5,-0.3 0.5,0.3, height 0.4
C0603 [mm]
  rect 0.64x0.89 smd mask+0.05: 1(-0.7,0) 2(0.7,0)
  silkscreen extent -1.05,-0.55 1.02,0.55, body extent -0.9,-0.5 0.9,0.5, height 1.4
C0805 [mm]
  rect 0.9x1.4 smd mask+0.05: 1(-0.85,0) 2(0.85,0)
  silkscreen extent -1.3,-0.77 1.3,0.77, body extent -1.1,-0.7 1.1,0.7, height 1.35
CON_SAMTEC_SSQ-106-03-F-S [mm] "MCD-02623"
  rect 1.7x1.7 hole 1 mask+0.05: 1(-6.35,0)
  round 1.7 hole 1 mask+0.05: 2(-3.81,0) 3(-1.27,0) 4(1.27,0) 5(3.81,0) 6(6.35,0)
  silkscreen extent -7.88,-1.21 7.88,1.21, body extent -7.87,-1.21 7.87,1.21, height 8.51
CON_SAMTEC_SSQ-108-03-F-S [mm] "MCD-02624"
  rect 1.7x1.7 hole 1 mask+0.05: 1(-8.89,0)
  round 1.7 hole 1 mask+0.05: 2(-6.35,0) 3(-3.81,0) 4(-1.27,0) 5(1.27,0) 6(3.81,0) 7(6.35,0) 8(8.89,0)
  silkscreen extent -10.41,-1.21 10.41,1.21, body extent -10.41,-1.21 10.41,1.21, height 8.51
CON_SAMTEC_SSQ-110-03-F-S [mm] "MCD-02625"
  rect 1.7x1.7 hole 1 mask+0.05: 1(-11.43,0)
  round 1.7 hole 1 mask+0.05: 2(-8.89,0) 3(-6.35,0) 4(-3.81,0) 5(-1.27,0) 6(1.27,0) 7(3.81,0) 8(6.35,0) 9(8.89,0) 10(11.43,0)
  silkscreen extent -12.95,-1.21 12.95,1.21, body extent -12.95,-1.21 12.95,1.21, height 8.51
CON_SAMTEC_TSW-102-07-G-S [mm]
  rect 1.85x1.85 / inner round 1.85 / far side rect 1.85x1.85 hole 1 mask+0.05: 1(-1.27,0)
  round 1.85 hole 1 mask+0.05: 2(1.27,0)
  silkscreen extent -2.58,-1.3 2.58,1.3, body extent -2.67,-1.3 2.58,1.3, height 8.38
CON_SAMTEC_TSW-102-09-X-S [mm]
  rect 1.85x1.85 / inner round 1.85 / far side rect 1.85x1.85 hole 1 mask+0.05: 1(-1.27,0)
  round 1.85 hole 1 mask+0.05: 2(1.27,0)
  silkscreen extent -2.64,-1.37 2.64,1.37, body extent -2.67,-1.3 2.58,1.3, height 8.38
CON_SAMTEC_TSW-104-07-G-S [mm]
  rect 1.85x1.85 / inner round 1.85 / far side rect 1.85x1.85 hole 1 mask+0.05: 1(-3.81,0)
  round 1.85 hole 1 mask+0.05: 2(-1.27,0) 3(1.27,0) 4(3.81,0)
  silkscreen extent -5.12,-1.3 5.12,1.3, body extent -5.21,-1.37 5.18,1.37, height 8.38
CON_SAMTEC_TSW-105-07-X-D [mm]
  rect 1.85x1.85 / inner round 1.85 / far side rect 1.85x1.85 hole 1 mask+0.05: 1(-5.08,-1.27)
  round 1.85 hole 1 mask+0.05: 2(-5.08,1.27) 3(-2.54,-1.27) 4(-2.54,1.27) 5(0,-1.27) 6(0,1.27) 7(2.54,-1.27) 8(2.54,1.27) 9(5.08,-1.27) 10(5.08,1.27)
  silkscreen extent -6.35,-2.54 6.35,2.54, body extent -6.35,-2.54 6.35,2.55, height 8.38
CON_SAMTEC_TSW-119-09-X-D [mm]
  rect 1.85x1.85 / inner round 1.85 / far side rect 1.85x1.85 hole 1 mask+0.05: 1(-22.86,-1.27)
  round 1.85 hole 1 mask+0.05: 2(-22.86,1.27) 3(-20.32,-1.27) 4(-20.32,1.27) 5(-17.78,-1.27) 6(-17.78,1.27) 7(-15.24,-1.27) 8(-15.24,1.27) 9(-12.7,-1.27) 10(-12.7,1.27) 11(-10.16,-1.27) 12(-10.16,1.27) 13(-7.62,-1.27) 14(-7.62,1.27) 15(-5.08,-1.27) 16(-5.08,1.27) 17(-2.54,-1.27) 18(-2.54,1.27) 19(0,-1.27) 20(0,1.27) 21(2.54,-1.27) 22(2.54,1.27) 23(5.08,-1.27) 24(5.08,1.27) 25(7.62,-1.27) 26(7.62,1.27) 27(10.16,-1.27) 28(10.16,1.27) 29(12.7,-1.27) 30(12.7,1.27) 31(15.24,-1.27) 32(15.24,1.27) 33(17.78,-1.27) 34(17.78,1.27) 35(20.32,-1.27) 36(20.32,1.27) 37(22.86,-1.27) 38(22.86,1.27)
  silkscreen extent -24.13,-2.54 24.13,2.54, body extent -24.13,-2.55 24.13,2.54, height 8.38
CON_STDC14_Receiver_MEDIUM_WITH_MIPI10_3D [mm] "compatible with FTSH-105-01-L-DV,-K and FTSH-107-01-L-DV,-K,-A,-P,-ES"
  round 0 hole 1.19 unplated mask+0.05: 0(-5.445,0) 0(5.445,0)
  round 0 hole 0.97 unplated mask+0.05: 0(-3.175,0) 0(3.175,0)
  rect 0.74x2.79 smd mask+0.05: 1(-3.81,-2.032) 2(-3.81,2.032) 3(-2.54,-2.032) 4(-2.54,2.032) 5(-1.27,-2.032) 6(-1.27,2.032) 7(0,-2.032) 8(0,2.032) 9(1.27,-2.032) 10(1.27,2.032) 11(2.54,-2.032) 12(2.54,2.032) 13(3.81,-2.032) 14(3.81,2.032)
  silkscreen extent -6.3,-4.38 6.3,3.6, body extent -6.3,-2.92 6.3,2.92, height 6.6
"CON_USB-TYPEC_WE_632723300011 " [mm] "MCD-02273"
  rect 0.3x1.2 smd mask+0.05: A1(-2.75,10.58) A2(-2.25,10.58) A3(-1.75,10.58) A4(-1.25,10.58) A5(-0.75,10.58) A6(-0.25,10.58) A7(0.25,10.58) A8(0.75,10.58) A9(1.25,10.58) A10(1.75,10.58) A11(2.25,10.58) A12(2.75,10.58)
  round 0.6 hole 0.4 mask+0.05: B1(2,9.33) B1(2.8,9.33) B2(2.4,8.62) B3(1.6,8.62) B4(1.2,9.33) B5(0.8,8.62) B6(0.4,9.33) B7(-0.4,9.33) B8(-0.8,8.62) B9(-1.2,9.33) B10(-1.6,8.62) B11(-2.4,8.62) B12(-2.8,9.33) B12(-2,9.33)
  oval 1.15x1.55 hole 0.45 slot 0.85 at 90 deg mask+0.05: SH1(-4.27,8.18) SH2(-4.27,3.45) SH3(4.27,8.18) SH4(4.27,3.45)
  silkscreen extent -4.38,-0.95 4.38,10.38, body extent -4.38,-0.97 4.38,10.82, height 3.03
CRY_NX1610SE_2P [mm] "MCD-02291"
  rect 0.5x1 smd mask+0.05: 1(-0.55,0) 2(0.55,0)
  silkscreen extent -0.13,-0.5 0.13,0.5, body extent -0.8,-0.5 0.8,0.5, height 0.45
CRY_NX2016SA_4P [mm]
  rect 0.85x0.75 smd mask+0.05: 1(-0.675,-0.525) 2(0.675,-0.525) 3(0.675,0.525) 4(-0.675,0.525)
  silkscreen extent -1.22,-1.02 1.05,0.85, body extent -1.05,-0.85 1.05,0.85, height 0.7
DIO_SOD523_1A_2K [mm] "MCD-01677"
  rect 0.65x0.3 smd mask+0.05: 1(-0.675,0) 2(0.675,0)
  silkscreen extent -0.65,-0.45 1.05,0.55, body extent -0.85,-0.45 0.85,0.45, height 0.71
ESD_QFN2_1P6X1_P125 [mm]
  rect 0.55x0.8 smd mask+0.05: 1(-0.625,0) 2(0.625,0)
  silkscreen extent -1,-0.55 0.85,0.55, body extent -0.85,-0.55 0.85,0.55, height 0.61
ESD_QFN1610_2N_1K_2A [mm] "DFN, 2-Leads, Body 1.60x1.00mm"
  rect 0.55x0.9 smd mask+0.05: 1(-0.625,0) 2(0.625,0)
  silkscreen extent -1.02,-0.58 0.85,0.58, body extent -0.85,-0.55 0.85,0.55, height 0.6
ESD_QFN-6L_1P7X1P5_P050 [mm]
  rect 0.25x0.6 smd mask+0.05: 1(-0.5,-0.65) 2(0,-0.65) 3(0.5,-0.65) 4(0.5,0.65) 5(0,0.65) 6(-0.5,0.65)
  silkscreen extent -0.9,-0.8 0.9,0.8, body extent -0.9,-0.8 0.9,0.8, height 0.56
ESD_SOT23-6L [mm]
  rect 0.6x1.2 smd mask+0.05: 1(-0.95,-1.15) 2(0,-1.15) 3(0.95,-1.15) 4(0.95,1.15) 5(0,1.15) 6(-0.95,1.15)
  silkscreen extent -1.53,-0.87 1.53,0.87, body extent -1.52,-1.5 1.52,1.5, height 1.45
ESD_SOT323-5L [mm]
  rect 0.4x1.2 smd mask+0.05: 1(-0.65,-0.85) 2(0,-0.85) 3(0.65,-0.85) 4(0.65,0.85) 5(-0.65,0.85)
  silkscreen extent -1.22,-1.21 1.22,0.77, body extent -1.15,-1.05 1.15,1.05, height 1.1
ESD_ST0201 [mm]
  rect 0.425x0.33 smd mask+0.05: 1(-0.312,0) 2(0.312,0)
  silkscreen extent -0.55,-0.3 0.33,0.3, body extent -0.34,-0.18 0.34,0.18, height 0.34
ICC_DFN6-EPAD_3X3_P095 [mm]
  rect 0.45x0.5 smd mask+0.05: 1(-0.95,-1.3) 2(0,-1.3) 3(0.95,-1.3) 4(0.95,1.3) 5(0,1.3) 6(-0.95,1.3)
  rect 2.5x1.7 smd mask+0.05: EP(0,0)
  silkscreen extent -1.55,-1.55 1.55,1.55, body extent -1.55,-1.55 1.55,1.55, height 1
ICC_LQFP64_10X10_P050_SOCKET_YAMAICHI_IC149-064-069-B5_NM [mm]
  rect 1x2.5 smd rot 135 mask+0.05: 0(-6,6) 0(6,-6)
  rect 1x2.5 smd rot 45 mask+0.05: 0(-6,-6) 0(6,6)
  round 0.5 hole 1 unplated mask+0.05: 0(0,3.1) 0(0,-3.1)
  rect 0.3x1.7 smd mask+0.05: 1(-3.75,-5.9) 2(-3.25,-5.9) 3(-2.75,-5.9) 4(-2.25,-5.9) 5(-1.75,-5.9) 6(-1.25,-5.9) 7(-0.75,-5.9) 8(-0.25,-5.9) 9(0.25,-5.9) 10(0.75,-5.9) 11(1.25,-5.9) 12(1.75,-5.9) 13(2.25,-5.9) 14(2.75,-5.9) 15(3.25,-5.9) 16(3.75,-5.9) 33(3.75,5.9) 34(3.25,5.9) 35(2.75,5.9) 36(2.25,5.9) 37(1.75,5.9) 38(1.25,5.9) 39(0.75,5.9) 40(0.25,5.9) 41(-0.25,5.9) 42(-0.75,5.9) 43(-1.25,5.9) 44(-1.75,5.9) 45(-2.25,5.9) 46(-2.75,5.9) 47(-3.25,5.9) 48(-3.75,5.9)
  rect 1.7x0.3 smd mask+0.05: 17(5.9,-3.75) 18(5.9,-3.25) 19(5.9,-2.75) 20(5.9,-2.25) 21(5.9,-1.75) 22(5.9,-1.25) 23(5.9,-0.75) 24(5.9,-0.25) 25(5.9,0.25) 26(5.9,0.75) 27(5.9,1.25) 28(5.9,1.75) 29(5.9,2.25) 30(5.9,2.75) 31(5.9,3.25) 32(5.9,3.75) 49(-5.9,3.75) 50(-5.9,3.25) 51(-5.9,2.75) 52(-5.9,2.25) 53(-5.9,1.75) 54(-5.9,1.25) 55(-5.9,0.75) 56(-5.9,0.25) 57(-5.9,-0.25) 58(-5.9,-0.75) 59(-5.9,-1.25) 60(-5.9,-1.75) 61(-5.9,-2.25) 62(-5.9,-2.75) 63(-5.9,-3.25) 64(-5.9,-3.75)
  silkscreen extent -5.05,-5.05 5.05,5.05, body extent -6,-6 6,6, height 1.6
ICC_SOT23-5L_H1P45 [mm]
  rect 0.6x1.3 smd mask+0.05: 1(-0.95,-1.1) 2(0,-1.1) 3(0.95,-1.1) 4(0.95,1.1) 5(-0.95,1.1)
  silkscreen extent -1.75,-1.68 1.6,0.97, body extent -1.52,-1.25 1.52,1.25, height 1.45
ICC_UFBGA201_176+25_10X10_P065 [mm] "IPC"
  round 0.25 smd mask+0.05: A1(-4.55,4.55) A2(-3.9,4.55) A3(-3.25,4.55) A4(-2.6,4.55) A5(-1.95,4.55) A6(-1.3,4.55) A7(-0.65,4.55) A8(0,4.55) A9(0.65,4.55) A10(1.3,4.55) A11(1.95,4.55) A12(2.6,4.55) A13(3.25,4.55) A14(3.9,4.55) A15(4.55,4.55) B1(-4.55,3.9) B2(-3.9,3.9) B3(-3.25,3.9) B4(-2.6,3.9) B5(-1.95,3.9) B6(-1.3,3.9) B7(-0.65,3.9) B8(0,3.9) B9(0.65,3.9) B10(1.3,3.9) B11(1.95,3.9) B12(2.6,3.9) B13(3.25,3.9) B14(3.9,3.9) B15(4.55,3.9) C1(-4.55,3.25) C2(-3.9,3.25) C3(-3.25,3.25) C4(-2.6,3.25) C5(-1.95,3.25) C6(-1.3,3.25) C7(-0.65,3.25) C8(0,3.25) C9(0.65,3.25) C10(1.3,3.25) C11(1.95,3.25) C12(2.6,3.25) C13(3.25,3.25) C14(3.9,3.25) C15(4.55,3.25) D1(-4.55,2.6) D2(-3.9,2.6) D3(-3.25,2.6) D4(-2.6,2.6) D5(-1.95,2.6) D6(-1.3,2.6) D7(-0.65,2.6) D8(0,2.6) D9(0.65,2.6) D10(1.3,2.6) D11(1.95,2.6) D12(2.6,2.6) D13(3.25,2.6) D14(3.9,2.6) D15(4.55,2.6) E1(-4.55,1.95) E2(-3.9,1.95) E3(-3.25,1.95) E4(-2.6,1.95) E12(2.6,1.95) E13(3.25,1.95) E14(3.9,1.95) E15(4.55,1.95) F1(-4.55,1.3) F2(-3.9,1.3) F3(-3.25,1.3) F4(-2.6,1.3) F6(-1.3,1.3) F7(-0.65,1.3) F8(0,1.3) F9(0.65,1.3) F10(1.3,1.3) F12(2.6,1.3) F13(3.25,1.3) F14(3.9,1.3) F15(4.55,1.3) G1(-4.55,0.65) G2(-3.9,0.65) G3(-3.25,0.65) G4(-2.6,0.65) G6(-1.3,0.65) G7(-0.65,0.65) G8(0,0.65) G9(0.65,0.65) G10(1.3,0.65) G12(2.6,0.65) G13(3.25,0.65) G14(3.9,0.65) G15(4.55,0.65) H1(-4.55,0) H2(-3.9,0) H3(-3.25,0) H4(-2.6,0) H6(-1.3,0) H7(-0.65,0) H8(0,0) H9(0.65,0) H10(1.3,0) H12(2.6,0) H13(3.25,0) H14(3.9,0) H15(4.55,0) J1(-4.55,-0.65) J2(-3.9,-0.65) J3(-3.25,-0.65) J4(-2.6,-0.65) J6(-1.3,-0.65) J7(-0.65,-0.65) J8(0,-0.65) J9(0.65,-0.65) J10(1.3,-0.65) J12(2.6,-0.65) J13(3.25,-0.65) J14(3.9,-0.65) J15(4.55,-0.65) K1(-4.55,-1.3) K2(-3.9,-1.3) K3(-3.25,-1.3) K4(-2.6,-1.3) K6(-1.3,-1.3) K7(-0.65,-1.3) K8(0,-1.3) K9(0.65,-1.3) K10(1.3,-1.3) K12(2.6,-1.3) K13(3.25,-1.3) K14(3.9,-1.3) K15(4.55,-1.3) L1(-4.55,-1.95) L2(-3.9,-1.95) L3(-3.25,-1.95) L4(-2.6,-1.95) L12(2.6,-1.95) L13(3.25,-1.95) L14(3.9,-1.95) L15(4.55,-1.95) M1(-4.55,-2.6) M2(-3.9,-2.6) M3(-3.25,-2.6) M4(-2.6,-2.6) M5(-1.95,-2.6) M6(-1.3,-2.6) M7(-0.65,-2.6) M8(0,-2.6) M9(0.65,-2.6) M10(1.3,-2.6) M11(1.95,-2.6) M12(2.6,-2.6) M13(3.25,-2.6) M14(3.9,-2.6) M15(4.55,-2.6) N1(-4.55,-3.25) N2(-3.9,-3.25) N3(-3.25,-3.25) N4(-2.6,-3.25) N5(-1.95,-3.25) N6(-1.3,-3.25) N7(-0.65,-3.25) N8(0,-3.25) N9(0.65,-3.25) N10(1.3,-3.25) N11(1.95,-3.25) N12(2.6,-3.25) N13(3.25,-3.25) N14(3.9,-3.25) N15(4.55,-3.25) P1(-4.55,-3.9) P2(-3.9,-3.9) P3(-3.25,-3.9) P4(-2.6,-3.9) P5(-1.95,-3.9) P6(-1.3,-3.9) P7(-0.65,-3.9) P8(0,-3.9) P9(0.65,-3.9) P10(1.3,-3.9) P11(1.95,-3.9) P12(2.6,-3.9) P13(3.25,-3.9) P14(3.9,-3.9) P15(4.55,-3.9) R1(-4.55,-4.55) R2(-3.9,-4.55) R3(-3.25,-4.55) R4(-2.6,-4.55) R5(-1.95,-4.55) R6(-1.3,-4.55) R7(-0.65,-4.55) R8(0,-4.55) R9(0.65,-4.55) R10(1.3,-4.55) R11(1.95,-4.55) R12(2.6,-4.55) R13(3.25,-4.55) R14(3.9,-4.55) R15(4.55,-4.55)
  silkscreen extent -5.22,-5.07 5.07,5.23, body extent -5.07,-5.07 5.07,5.07, height 0.61
ICC_WSON8-EPAD_2X2_P050 [mm] "MCD-02194"
  rect 0.5x0.3 smd paste+0 mask+0.05: 1(-0.9,0.75) 2(-0.9,0.25) 3(-0.9,-0.25) 4(-0.9,-0.75) 5(0.9,-0.75) 6(0.9,-0.25) 7(0.9,0.25) 8(0.9,0.75)
  rect 0.9x1.6 smd paste+0 mask+0.05: 9(0,0)
  silkscreen extent -0.5,-1 0.5,1, body extent -1,-1 1,1, height 0.81
LED_0603_OSRAM_LG-Q396-PS-35_GREEN_1A2K_H0P4 [mm]
  rect 0.8x0.8 smd mask+0.05: 1(-0.75,0) 2(0.75,0)
  silkscreen extent -0.85,-0.53 1.28,0.53, body extent -0.85,-0.45 0.85,0.45, height 0.6
LED_0603_VISHAY_VLMS1300-GS08_RED_1A2K_H0P8 [mm]
  rect 0.8x0.8 smd mask+0.05: 1(-0.75,0) 2(0.75,0)
  silkscreen extent -0.85,-0.53 1.28,0.53, body extent -0.85,-0.45 0.85,0.45, height 0.8
LED_BI-GR_WE-150141SV73110 [mm] "MCD-02631"
  rect 1.1x1.5 smd mask+0.05: 1(-0.75,1.5) 2(0.75,1.5) 3(-0.75,-1.5) 4(0.75,-1.5)
  silkscreen extent -1.65,-1.85 1.5,1.7, body extent -1.5,-1.85 1.5,1.85, height 2.1
LOGO_ETIQUETTE [mm]
  silkscreen extent 0,0 27,10
MIRE_PLACE_SMD_0P8MM [mm]
  round 0.8 smd paste-10 mask+0.2: 1(0,0)
  Top Layer keep-out circle w0.01: c0,0 r0.804
MOS_SOT23-5L [mm]
  rect 0.6x1.3 smd mask+0.05: 1(-0.95,-1.1) 2(0,-1.1) 3(0.95,-1.1) 4(0.95,1.1) 5(-0.95,1.1)
  silkscreen extent -1.6,-0.95 1.6,0.97, body extent -1.52,-1.25 1.52,1.25, height 1.45
NPN_SOT23 [mm]
  rect 1x1.4 smd mask+0.05: 1(-0.95,-1.1) 2(0.95,-1.1) 3(0,1.1)
  silkscreen extent -1.63,-0.82 1.63,0.82, body extent -1.56,-1.25 1.56,1.25, height 1.1
R0402 [mm]
  rect 0.51x0.7 smd mask+0.05: 1(-0.45,0) 2(0.45,0)
  silkscreen extent 0,-0.3 0,0.3, body extent -0.52,-0.3 0.52,0.3, height 0.4
R0603 [mm]
  rect 0.64x1 smd mask+0.05: 1(-0.7,0) 2(0.7,0)
  silkscreen extent -1.05,-0.58 1.05,0.58, body extent -0.9,-0.5 0.9,0.5, height 0.56
REG_SOT223-TAB [mm]
  rect 1.5x1.65 smd mask+0.05: 1(-2.3,-3.175) 2(0,-3.175) 3(2.3,-3.175)
  rect 3.5x1.65 smd mask+0.05: 4(0,3.175)
  silkscreen extent -3.35,-2.15 3.35,2.12, body extent -3.35,-3.48 3.35,3.48, height 1.8
SOLDER-BRIDGE_R0603-0R [mil]
  round 10 smd paste-393.7: 1(-19.68,0) 2(23.62,0)
  Top Layer region: -47.24,-19.68 -47.24,19.69 -15.75,19.69 3.94,0 -15.75,-19.68 -47.24,-19.68
  Top Layer region: -5.91,19.69 13.78,0 -5.91,-19.68 47.24,-19.68 47.24,19.69 -5.91,19.69
  silkscreen extent -50,-23 50,23, body extent -36,-20 36,20, height 22
SWI_APEM_ADTSM644KV_BLACK [mm] "MCD-02524"
  rect 1.55x1.3 smd mask+0.05: 1(-3.975,-2.25) 2(3.975,-2.25) 3(-3.975,2.25) 4(3.975,2.25)
  silkscreen extent -3.1,-3.1 3.1,3.1, body extent -4.5,-3.1 4.5,3.1, height 7.3
TP_SMD_1MM [mm]
  round 1 smd paste-10 mask+0.05: 1(0,0)
  silkscreen extent -0.7,-0.7 0.7,0.7

## Part data
B1 B2: library part MCD-02524, "Push Button, SPST-NO, 0.05A, 12V SMT, T=7.30mm, changeable caps AKTSC62x", Alternate_Manufacturer=DIPTRONICS, Alternate_Manufacturer_Part_Number=DTSM644SVTR, Manufacturer="APEM INC", Manufacturer_Part_Number=ADTSM644SVTR, Package=N/A, ComponentLink1URL=http://tunmcdsvn.tun.st.com/Component_Documentation_Library/Trunk/Misc/APEM_INC_ADTS_&_AKTSC_Series, Internal_Part_Number=MCD-02524, Order_Code_Digikey=679-3994-ND, Order_Code_Farnell=N/A, Order_Code_RS=N/A, Part_Preference=Recommended, Part_Type=Misc, Status=Checked
C1 C6 C7 C8 C9 C13 C14 C15 C16 C17 C18 C21 C22 C23 C24 C25 C26 C27: library part MCD-00006, "Capacitor, MLCC, 100nF, 16V, X7R, 10%, 0402, T=0.5mm", Alternate_Manufacturer=MURATA, Alternate_Manufacturer_Part_Number=GCM155R71C104KA55D, Manufacturer=YAGEO, Manufacturer_Part_Number=CC0402KRX7R7BB104, Package=C0402, ComponentLink1Description=Datasheet, ComponentLink1URL=http://tunmcdsvn.tun.st.com/Component_Datasheet_Library/Trunk/Capacitors/Yageo_Multilayer_Capacitor_X7R_series_100pF_to_22uF, Internal_Part_Number=MCD-00006, Part_Type=Capacitor, Provided_By=SUBCO, Status=Released
C2: library part MCD-00205, "Capacitor, MLCC, 100pF, 50V, NPO, +/-5%, 0402, T=0.5mm", Manufacturer=YAGEO, Manufacturer_Part_Number=CC0402JRNPO9BN101, Package=0402, Component_Country_Of_Origin=China, ComponentLink1URL=http://tunmcdsvn.tun.st.com/Component_Documentation_Library/Trunk/Capacitor/YAGEO_NP0_Series, Internal_Part_Number=MCD-00205, Order_Code_Digikey=311-1024-1-ND, Order_Code_Farnell=3019226RL, Order_Code_RS=N/A, Part_Preference=Recommended, Part_Type=Capacitor, Status=Released
C3 C20 C30: library part MCD-02198, "Capacitor, MLCC, 10nF, 50V, X7R, +/-10%, 0402, T=0.5mm", Manufacturer=YAGEO, Manufacturer_Part_Number=CC0402KRX7R9BB103, Package=0402, Component_Country_Of_Origin=China, ComponentLink1URL=http://tunmcdsvn.tun.st.com/Component_Documentation_Library/Trunk/Capacitor/YAGEO_X7R_Series, Internal_Part_Number=MCD-02198, Order_Code_Digikey=N/A, Order_Code_Farnell=N/A, Order_Code_RS=6169644, Part_Preference=Recommended, Part_Type=Capacitor, Status=Checked
  C30: ID=4298, ShowFields=YES
C4 C10 C12: library part MCD-02606, "Capacitor, MLCC, 2.2uF, 6.3V, X5R, +/-10%, 0402, T=0.5mm", Manufacturer=YAGEO, Manufacturer_Part_Number=CC0402KRX5R5BB225, Package=0402, ComponentLink1URL=http://tunmcdsvn.tun.st.com/Component_Documentation_Library/Trunk/Capacitor/YAGEO_X5R_Series, Internal_Part_Number=MCD-02606, Order_Code_Digikey=311-1682-2-ND, Order_Code_Farnell=3366429, Order_Code_RS=1992205, Part_Preference=Recommended, Part_Type=Capacitor, Status=New
C5 C28 C31: library part MCD-00099, "Capacitor, MLCC, 10uF, 10V, X5R, +/-10%, 0603, T=0.8mm", Manufacturer=MURATA, Manufacturer_Part_Number=GRM188R61A106KE69D, Package=0603, Component_Country_Of_Origin=Japan, ComponentLink1URL=http://tunmcdsvn.tun.st.com/Component_Documentation_Library/Trunk/Capacitor/MURATA_GRM_Series, Internal_Part_Number=MCD-00099, Order_Code_Digikey=490-10474-1-ND, Order_Code_Farnell=2494233, Order_Code_RS=170-6168, Part_Preference=Recommended, Part_Type=Capacitor, Status=Released
C11 C37 C39 C43 C53: library part MCD-00010, "Capacitor, MLCC, 1uF, 16V, X5R, 10%, 0603, T=0,8mm", Manufacturer=YAGEO, Manufacturer_Part_Number=CC0603KRX5R7BB105, Package=C0603, ComponentLink1URL=http://tunmcdsvn.tun.st.com/Component_Datasheet_Library/Trunk/Capacitors/Yageo_Multilayer_capacitor_X5R_series_100pF_to_100uF, Initial_Board_Reference=MB1274, Internal_Part_Number=MCD-00010, Part_Type=Capacitor, Status=Released
  C11: ComponentLink1Description=Datasheet, Item Type=Item, Path=ws/MCD_ApplicationBoards/Lists/MCDPARTSdatabase, Provided_By=SUBCO
  C37 C39 C43 C53: ComponentLink1Description=Yageo_Capacitor_X5R-series.pdf, ECCN_EU=n/a, ECCN_US=n/a, Provided_By=Subcon
C19: library part MCD-02372, "Capacitor, MLCC, 2.2uF, 25V, X7R, +/-10%, 0805, T=1,25mm", Alternate_Manufacturer=N/A, Manufacturer=MURATA, Manufacturer_Part_Number=GRM21BR71E225KE11L, Package=C0805, Alternate_Manufacturer_Part_Number=N/A, ComponentLink1Description=Datasheet, ComponentLink1URL=http://tunmcdsvn.tun.st.com/Component_Documentation_Library/Trunk/Capacitor/MURATA_GRM_Series/GRM21BR71E225KE11, ECCN_EU=NEC, ECCN_US=EAR99, Internal_Part_Number=MCD-02372, Order_Code_Digikey=490-14467, Order_Code_Farnell=2688538, Order_Code_RS=N/A, Part_Preference=Recommended, Part_Type=Capacitor, Provided_By=SUBCO, Status=Checked
C29: library part MCD-02355, "Capacitor, MLCC, 100nF, 25V, X7R, +/-10%, 0402, T=0.5mm", Manufacturer=WALSIN, Manufacturer_Part_Number=0402B104K250CT, Package=0402, Component_Country_Of_Origin=Unknown, ComponentLink1URL=http://tunmcdsvn.tun.st.com/Component_Documentation_Library/Trunk/Capacitor/WALSIN_Monolithic_Series/, Internal_Part_Number=MCD-02355, Order_Code_Digikey=1292-1175-1-ND, Order_Code_Farnell=2496772, Order_Code_RS=176-3114, Part_Preference=Recommended, Part_Type=Capacitor, Status=Checked
C32 C33: library part MCD-01774, "Capacitor, MLCC, 2.7pF, 50V, NPO, +/-0.1pF, 0402, T=0.5mm", Manufacturer=YAGEO, Manufacturer_Part_Number=CC0402BRNPO9BN2R7, Package=0402, Component_Country_Of_Origin=China, ComponentLink1URL=http://tunmcdsvn.tun.st.com/Component_Documentation_Library/Trunk/Capacitor/YAGEO_NP0_Series, Internal_Part_Number=MCD-01774, Order_Code_Digikey=311-1619-1-ND, Order_Code_Farnell=N/A, Order_Code_RS=N/A, Part_Preference=Recommended, Part_Type=Capacitor, Status=Released
C34 C35 C36 C40 C42 C44 C45 C52 C54: library part MCD-00102, "Capacitor, MLCC, 100nF, 16V, X7R, 10%, 0402, T=0,5mm", Manufacturer=YAGEO, Manufacturer_Part_Number=CC0402KRX7R7BB104, Package=C0402, ComponentLink1Description=Yageo_Capacitor_X7R-series.pdf, ComponentLink1URL=http://tunmcdsvn.tun.st.com/Component_Datasheet_Library/Trunk/Capacitors/Yageo_Multilayer_Capacitor_X7R_series_100pF_to_22uF, ECCN_EU=n/a, ECCN_US=n/a, Initial_Board_Reference=MB1262, Internal_Part_Number=MCD-00102, Part_Type=Capacitor, Provided_By=Subcon, Status=Released
C38 C41: library part MCD-00014, "Capacitor, MLCC, 10uF, 25V, X5R, 10%, 0805, T=0,85mm", Manufacturer=YAGEO, Manufacturer_Part_Number=CC0805KRX5R8BB106, Package=C0805, ComponentLink1Description=Datasheet, ComponentLink1URL=http://tunmcdsvn.tun.st.com/Component_Datasheet_Library/Trunk/Capacitors/Yageo_Multilayer_capacitor_X5R_series_100pF_to_100uF, ECCN_EU=NEC, ECCN_US=EAR99, Internal_Part_Number=MCD-00014, Part_Type=Capacitor, Provided_By=SUBCO, Status=Released
C46: library part MCD-00016, "Capacitor, MLCC, 20pF, 50V, NPO, +/- 5%, 0402, T=0.5mm", Manufacturer=YAGEO, Manufacturer_Part_Number=CC0402JRNPO9BN200, Package=0402, Component_Country_Of_Origin=China, ComponentLink1URL=http://tunmcdsvn.tun.st.com/Component_Documentation_Library/Trunk/Capacitor/YAGEO_NP0_Series, ID=2479, Internal_Part_Number=MCD-00016, Order_Code_Digikey=311-1417-1-ND, Order_Code_Farnell=N/A, Order_Code_RS=N/A, Part_Preference=Recommended, Part_Type=Capacitor, ShowFields=YES, Status=Released
C47 C48: library part MCD-00012, "Capacitor, MLCC, 2.2uF, 10V, X5R, +/- 10%, 0603, T=0,8mm", Alternate_Manufacturer=KEMET, Alternate_Manufacturer_Part_Number=C0603C225K8PACTU, Manufacturer=YAGEO, Manufacturer_Part_Number=CC0603KRX5R6BB225, Package=C0603, BMS_Part_Number=9142010, ComponentLink1URL=http://tunmcdsvn.tun.st.com/Component_Datasheet_Library/Trunk/Capacitors/Yageo_Multilayer_capacitor_X5R_series_100pF_to_100uF, Internal_Part_Number=MCD-00012, Order_Code_Digikey=311-1451-1-ND, Order_Code_Farnell=2370679, Order_Code_RS=N/A, Part_Preference=Recommended, Part_Type=Capacitor, Status=Released
C49 C55: library part MCD-00009, "Capacitor, MLCC, 4.7uF, 16V, X5R, 10%, 0603, T=0.8mm", Manufacturer=YAGEO, Manufacturer_Part_Number=CC0603KRX5R7BB475, Package=C0603, ComponentLink1URL=http://tunmcdsvn.tun.st.com/Component_Datasheet_Library/Trunk/Capacitors/Yageo_Multilayer_capacitor_X5R_series_100pF_to_100uF, Internal_Part_Number=MCD-00009, Part_Type=Capacitor, Status=Released
  C49: ComponentLink1Description=Datasheet, ECCN_EU=NEC, ECCN_US=EAR99, Provided_By=SUBCO
  C55: ComponentLink1Description=Yageo_Capacitor_X5R-series.pdf, ECCN_EU=n/a, ECCN_US=n/a, Initial_Board_Reference=MB1274, Provided_By=subcon
C56 C59: library part MCD-00674, "Capacitor, MLCC, 6.8pF, 50V, NPO, +-0.25pF, 0402, T=0.5mm", Manufacturer=YAGEO, Manufacturer_Part_Number=CC0402CRNPO9BN6R8, Package=C0402, ComponentLink1Description=Datasheet, ComponentLink1URL=http://tunmcdsvn.tun.st.com/Component_Datasheet_Library/Trunk/Capacitors/Yageo_Capacitor_NP0_16V-to-50V, ECCN_EU=N/A, ECCN_US=N/A, Internal_Part_Number=MCD-00674, Part_Type=Capacitor, Provided_By=SUBCO, Status=Released
C57 C58: library part MCD-01775, "Capacitor, MLCC, 3.3pF, 50V, NPO, +/-0.1pF, 0402, T=0.5mm", Manufacturer=YAGEO, Manufacturer_Part_Number=CC0402BRNPO9BN3R3, Package=0402, Component_Country_Of_Origin=China, ComponentLink1URL=http://tunmcdsvn.tun.st.com/Component_Documentation_Library/Trunk/Capacitor/YAGEO_NP0_Series, ID=3875, Internal_Part_Number=MCD-01775, Order_Code_Digikey=311-1621-1-ND, Order_Code_Farnell=N/A, Order_Code_RS=N/A, Part_Preference=Recommended, Part_Type=Capacitor, ShowFields=YES, Status=Released
CN1 CN3: library part MCD-02273, "USB_TypeC, 24pins, RA, TH, T=1.9mm (USB certified)", Manufacturer="WURTH ELEKTRONIK", Manufacturer_Part_Number=632723300011, Component_Country_Of_Origin=China, ComponentLink1URL=http://tunmcdsvn.tun.st.com/Component_Datasheet_Library/Trunk/Connectors/WURTH_ELEKTRONIK_USB_TYPE-C_632723300011, ID=4373, Internal_Part_Number=MCD-02273, Order_Code_Digikey=732-9618-1-ND, Order_Code_Farnell=2984404, Order_Code_RS=N/A, Part_Preference=Recommended, Part_Type=Connector, ShowFields=YES, Status=Released
CN2: library part MCD-00029, "Header, 4x1, 2,54mm, VR, TH, Height 5.84mm/2.54mm", Manufacturer=SAMTEC, Manufacturer_Part_Number=TSW-104-07-x-S, ComponentLink1Description=Datasheet, ComponentLink1URL=http://tunmcdsvn.tun.st.com/Component_Datasheet_Library/Trunk/Connectors/Samtec_TSW-HTSW-series, Internal_Part_Number=MCD-00029, Part_Type=Connector, Provided_By=SUBCO, Status=Released
CN4: library part MCD-01226, "Header, 5x2, 1.27mm, VR, SMD, T=5.97mm/3.05mm", Manufacturer=SAMTEC, Manufacturer_Part_Number=FTSH-105-01-L-DV-K, Component_Country_Of_Origin="China, Costa Rica, Malaysia, United States, Vietnam", ComponentLink1URL=http://tunmcdsvn.tun.st.com/Component_Documentation_Library/Trunk/Connector/SAMTEC_FTSH_Series/, Internal_Part_Number=MCD-01226, Order_Code_Digikey=SAM8799-ND, Order_Code_Farnell=2856879, Order_Code_RS=159-2332, Part_Preference=Recommended, Part_Type=Connector, Status=Released
CN5: library part MCD-02625, "Socket, 10x1, 2.54mm, VR, TH, T=8.51mm/10mm", Manufacturer=SAMTEC, Manufacturer_Part_Number=SSQ-110-03-F-S, Component_Country_Of_Origin="China, Costa Rica,  Malaysia, Vietnam, USA", ComponentLink1URL=http://tunmcdsvn.tun.st.com/Component_Documentation_Library/Trunk/Connector/SAMTEC_SSQ_Series/, ID=4731, Internal_Part_Number=MCD-02625, Order_Code_Digikey=SAM10010-ND, Order_Code_Farnell=2667433, Order_Code_RS=154-8308, Part_Preference=Recommended, Part_Type=Connector, ShowFields=YES, Status=Checked
CN6 CN9: library part MCD-02624, "Socket, 8x1, 2.54mm, VR, TH, T=8.51mm/10mm", Manufacturer=SAMTEC, Manufacturer_Part_Number=SSQ-108-03-F-S, Component_Country_Of_Origin="China, Costa Rica,  Malaysia, Vietnam, USA", ComponentLink1URL=http://tunmcdsvn.tun.st.com/Component_Documentation_Library/Trunk/Connector/SAMTEC_SSQ_Series/, ID=4730, Internal_Part_Number=MCD-02624, Order_Code_Digikey=SAM11912-ND, Order_Code_Farnell=2505051, Order_Code_RS=180-0395, Part_Preference=Recommended, Part_Type=Connector, ShowFields=YES, Status=Checked
CN7 CN10: library part MCD-00213, "Header, 19x2, 2,54mm, VR, TH, Height 5.84mm/10.16mm", Manufacturer=SAMTEC, Manufacturer_Part_Number=TSW-119-09-x-D, ComponentLink1Description=Datasheet, ComponentLink1URL=http://tunmcdsvn.tun.st.com/Component_Datasheet_Library/Trunk/Connectors/Samtec_TSW-HTSW-series, ECCN_EU=n/a, ECCN_US=n/a, Internal_Part_Number=MCD-00213, Part_Type=Connector, Provided_By=SUBCO, Status=Released
CN8: library part MCD-02623, "Socket, 6x1, 2.54mm, VR, TH, T=8.51mm/10mm", Manufacturer=SAMTEC, Manufacturer_Part_Number=SSQ-106-03-F-S, Component_Country_Of_Origin="China, Costa Rica,  Malaysia, Vietnam, USA", ComponentLink1URL=http://tunmcdsvn.tun.st.com/Component_Documentation_Library/Trunk/Connector/SAMTEC_SSQ_Series/, ID=4729, Internal_Part_Number=MCD-02623, Order_Code_Digikey=SAM10004-ND, Order_Code_Farnell=2578705, Order_Code_RS=180-0379, Part_Preference=Recommended, Part_Type=Connector, ShowFields=YES, Status=Checked
CN11 CN12: library part MCD-00214, "Header, 2x1, 2.54mm, VR, TH, T=5.84mm/10.16mm", Manufacturer=SAMTEC, Manufacturer_Part_Number=TSW-102-09-G-S, Alternate_Internal_Part_Number=MCD-02393, Component_Country_Of_Origin="China, Costa Rica, Malaysia, United States, Vietnam", ComponentLink1URL=http://tunmcdsvn.tun.st.com/Component_Documentation_Library/Trunk/Connector/SAMTEC_TSW_Series/, ID=2652, Internal_Part_Number=MCD-00214, Order_Code_Digikey=SAM10845-ND, Order_Code_Farnell=3663349, Order_Code_RS=180-3129, Part_Preference=Recommended, Part_Type=Connector, ShowFields=YES, Status=Released
D1 D2 D3 D4: library part MCD-01677, "Small signal Schottky diodes", Manufacturer=STMICROELECTRONICS, Manufacturer_HQ_COO=EU, Manufacturer_Part_Number=BAT54KFILM, Package=SOD-523, BMS_Part_Number=9151123, Component_Country_Of_Origin=China, ComponentLink1URL=http://tunmcdsvn.tun.st.com/Component_Datasheet_Library/Trunk/Diodes/STM_SCHOTTKY_DOUBLE_BAT54SWFILM/STM_SCHOTTKY_DOUBLE_BAT54SWFILM.pdf, Internal_Part_Number=MCD-01677, Part_Preference=Recommended, Part_Type=Diode, Status=Checked
JP1: library part MCD-00045, "Header, 2x1, 2,54mm, VR, TH, Height 5.84mm/2.54mm", Alternate_Manufacturer="JIUBABA; LIANYI", Alternate_Manufacturer_Part_Number=313102S111116;313102S111116, Manufacturer=SAMTEC, Manufacturer_Part_Number=TSW-102-07-G-S, ComponentLink1Description=Datasheet, ComponentLink1URL=http://tunmcdsvn.tun.st.com/Component_Datasheet_Library/Trunk/Connectors/Samtec_TSW-HTSW-series, Internal_Part_Number=MCD-00045, Part_Preference=Recommended, Part_Type=Connector, Status=Released
JP2 JP6: library part MCD-00683, "Header, 2x1, 2,54mm, VR, TH, Height 5.84mm/2.54mm - Shunt Fitted by default", Manufacturer=SAMTEC, Manufacturer_Part_Number=TSW-102-07-x-S, ComponentLink1Description=Samtec_connector_TSW-HTSW-series.pdf, ComponentLink1URL=http://tunmcdsvn.tun.st.com/Component_Datasheet_Library/Trunk/Connectors/Samtec_TSW-HTSW-series, ECCN_EU=n/a, ECCN_US=n/a, Initial_Board_Reference=MB1331, Internal_Part_Number=MCD-00683, Part_Type=Connector, Provided_By=Subcon, Status=Released
JP5: library part MCD-01203, "Header, 5x2, 2.54mm, VR, TH, T=5.84mm/2.54mm", Manufacturer=SAMTEC, Manufacturer_Part_Number=TSW-105-07-G-D, Alternate_Internal_Part_Number=MCD-02391, BMS_Part_Number=9083523, Component_Country_Of_Origin="China, Costa Rica, Malaysia, United States, Vietnam", ComponentLink1URL=http://tunmcdsvn.tun.st.com/Component_Documentation_Library/Trunk/Connector/SAMTEC_TSW_Series/, ID=3293, Internal_Part_Number=MCD-01203, Order_Code_Digikey=SAM1028-05-ND, Order_Code_Farnell=2578720, Order_Code_RS=161-2267, Part_Preference=Recommended, Part_Type=Connector, ShowFields=YES, Status=Released
LD1 LD7: library part MCD-02631, "LED Bicolor, Green/Red, 2V, 20mA,  4-PLCC", Manufacturer="WURTH ELEKTRONIK", Manufacturer_Part_Number=150141SV73110, Package=4-PLCC, ComponentLink1URL=http://tunmcdsvn.tun.st.com/Component_Documentation_Library/Trunk/Display/WURTH_ELEKTRONIK_150141SV73110, Internal_Part_Number=MCD-02631, Order_Code_Digikey=732-13404-2-ND, Order_Code_Farnell=2990869, Order_Code_RS=184-6963, Part_Preference=Recommended, Part_Type=Display, Status=Checked